# Allegro board NIR.brd
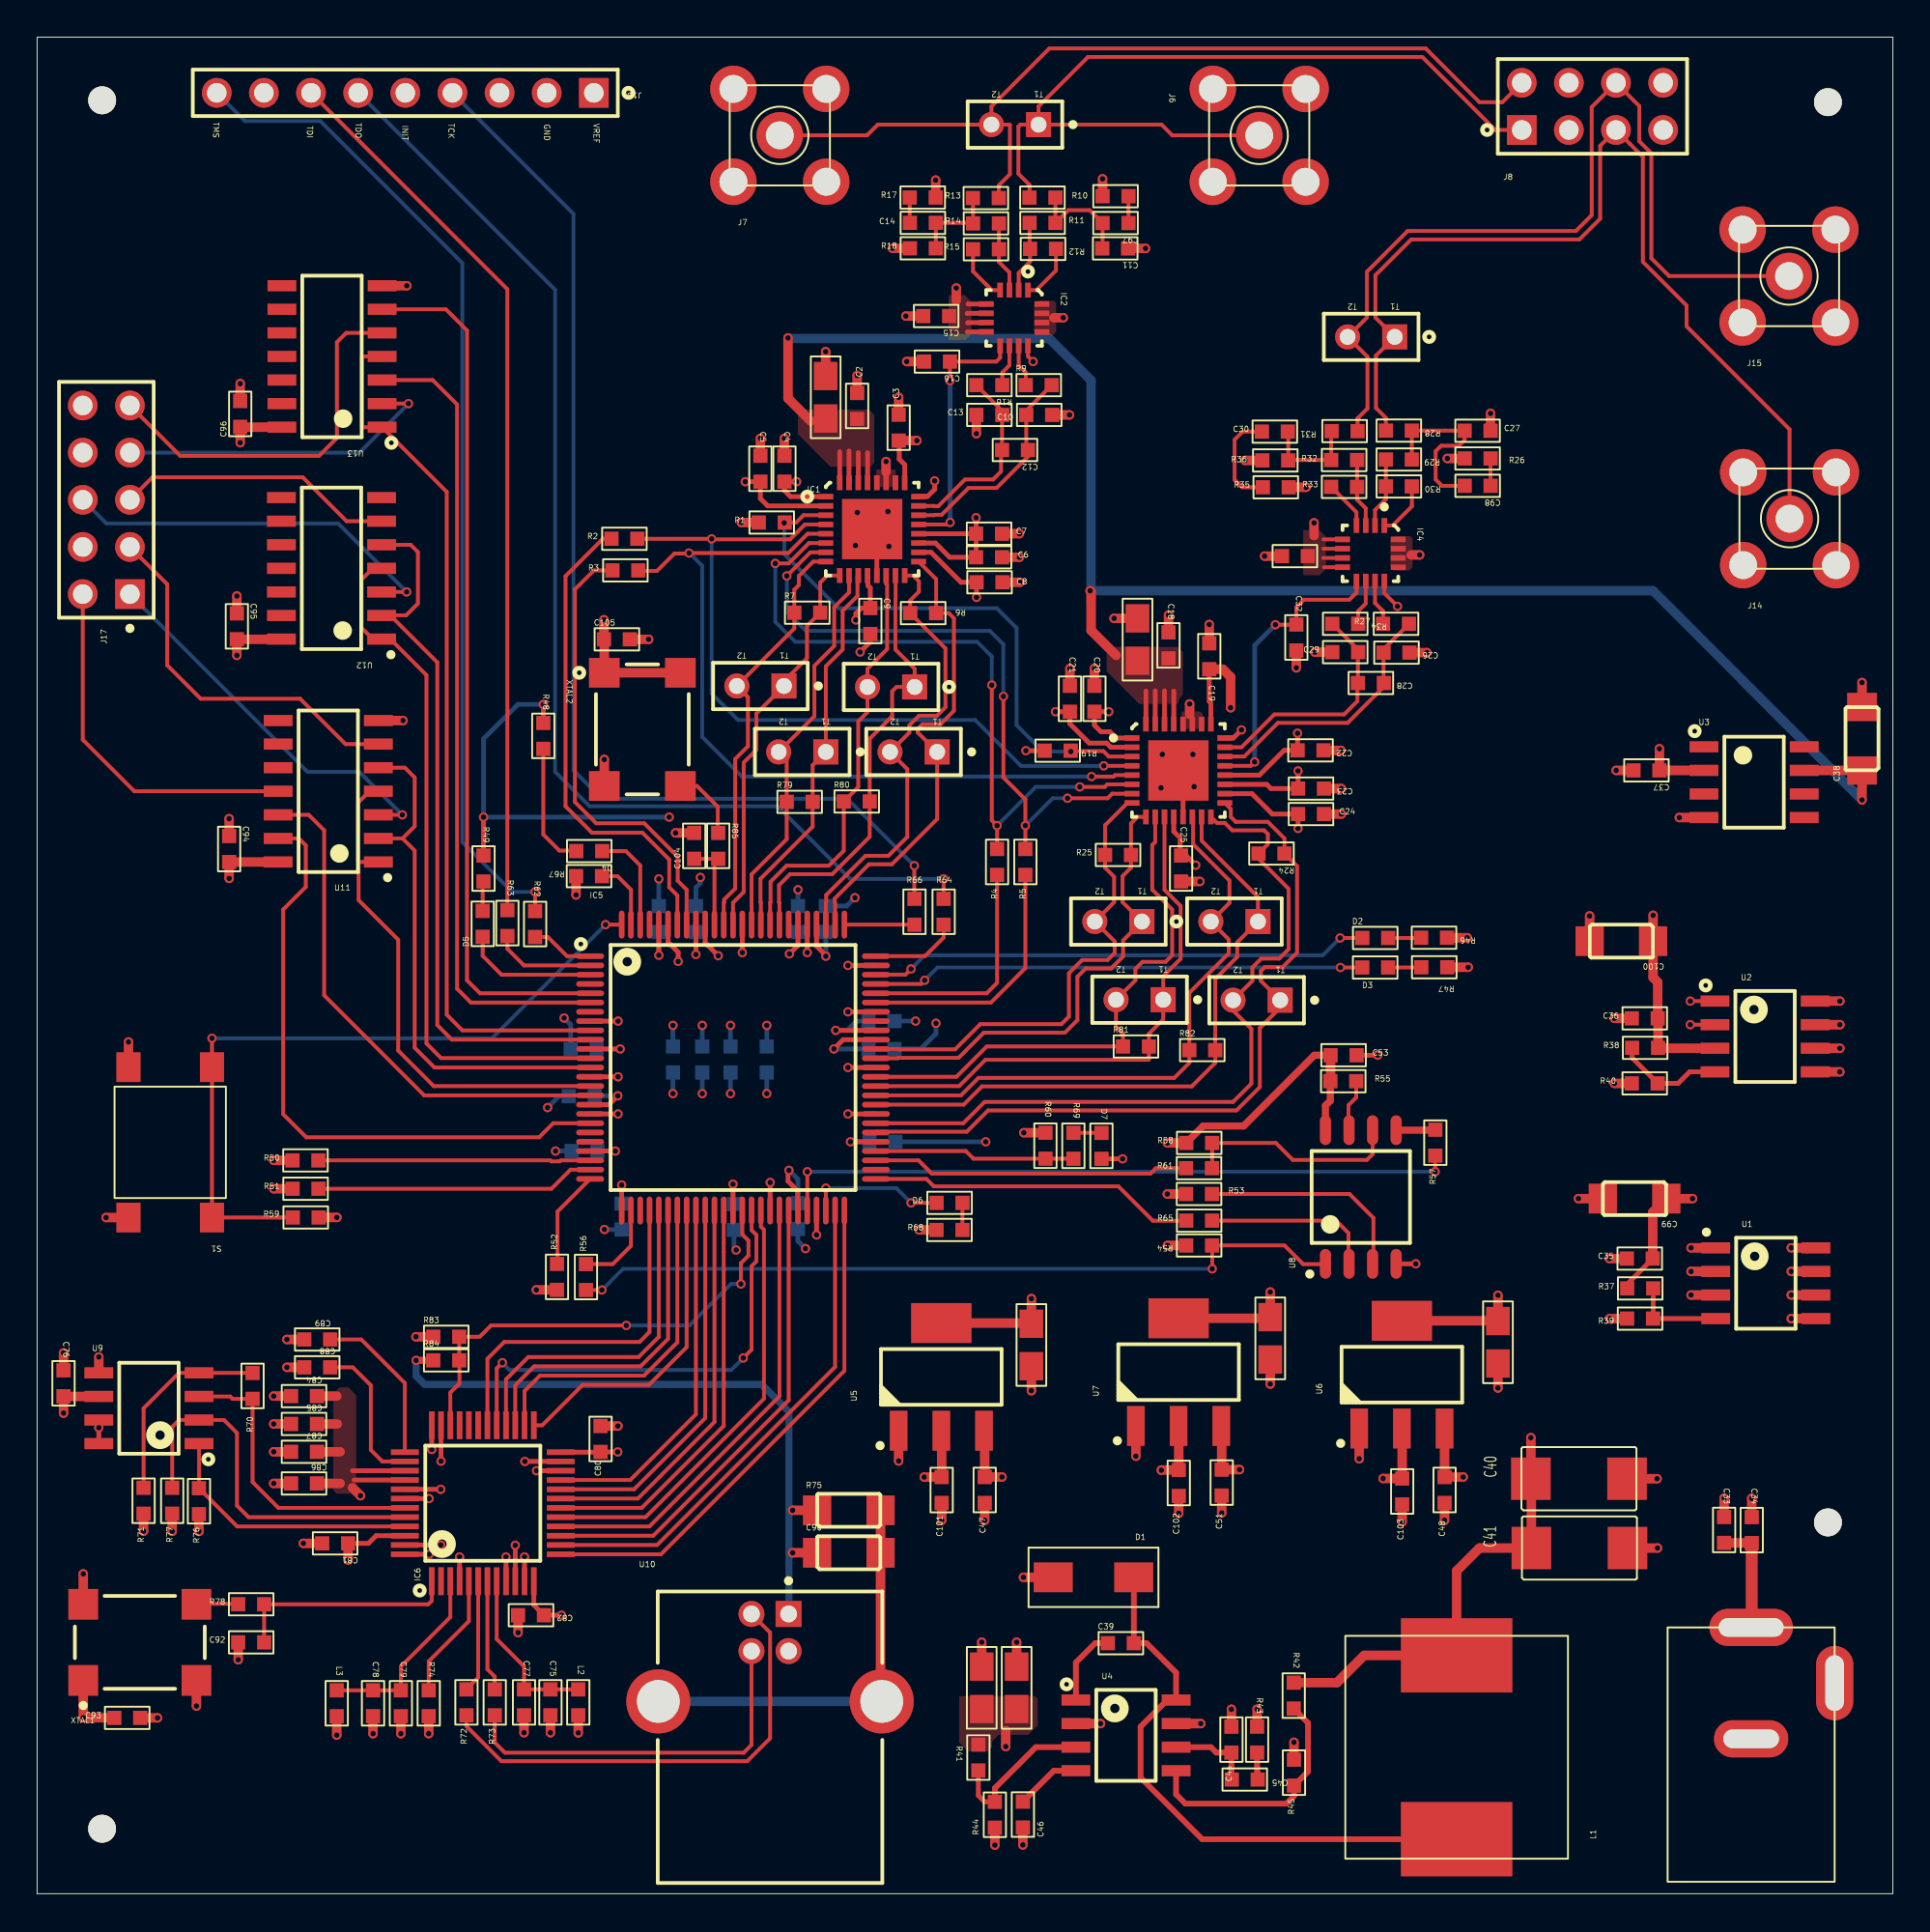
[diagram p0: board, top side]
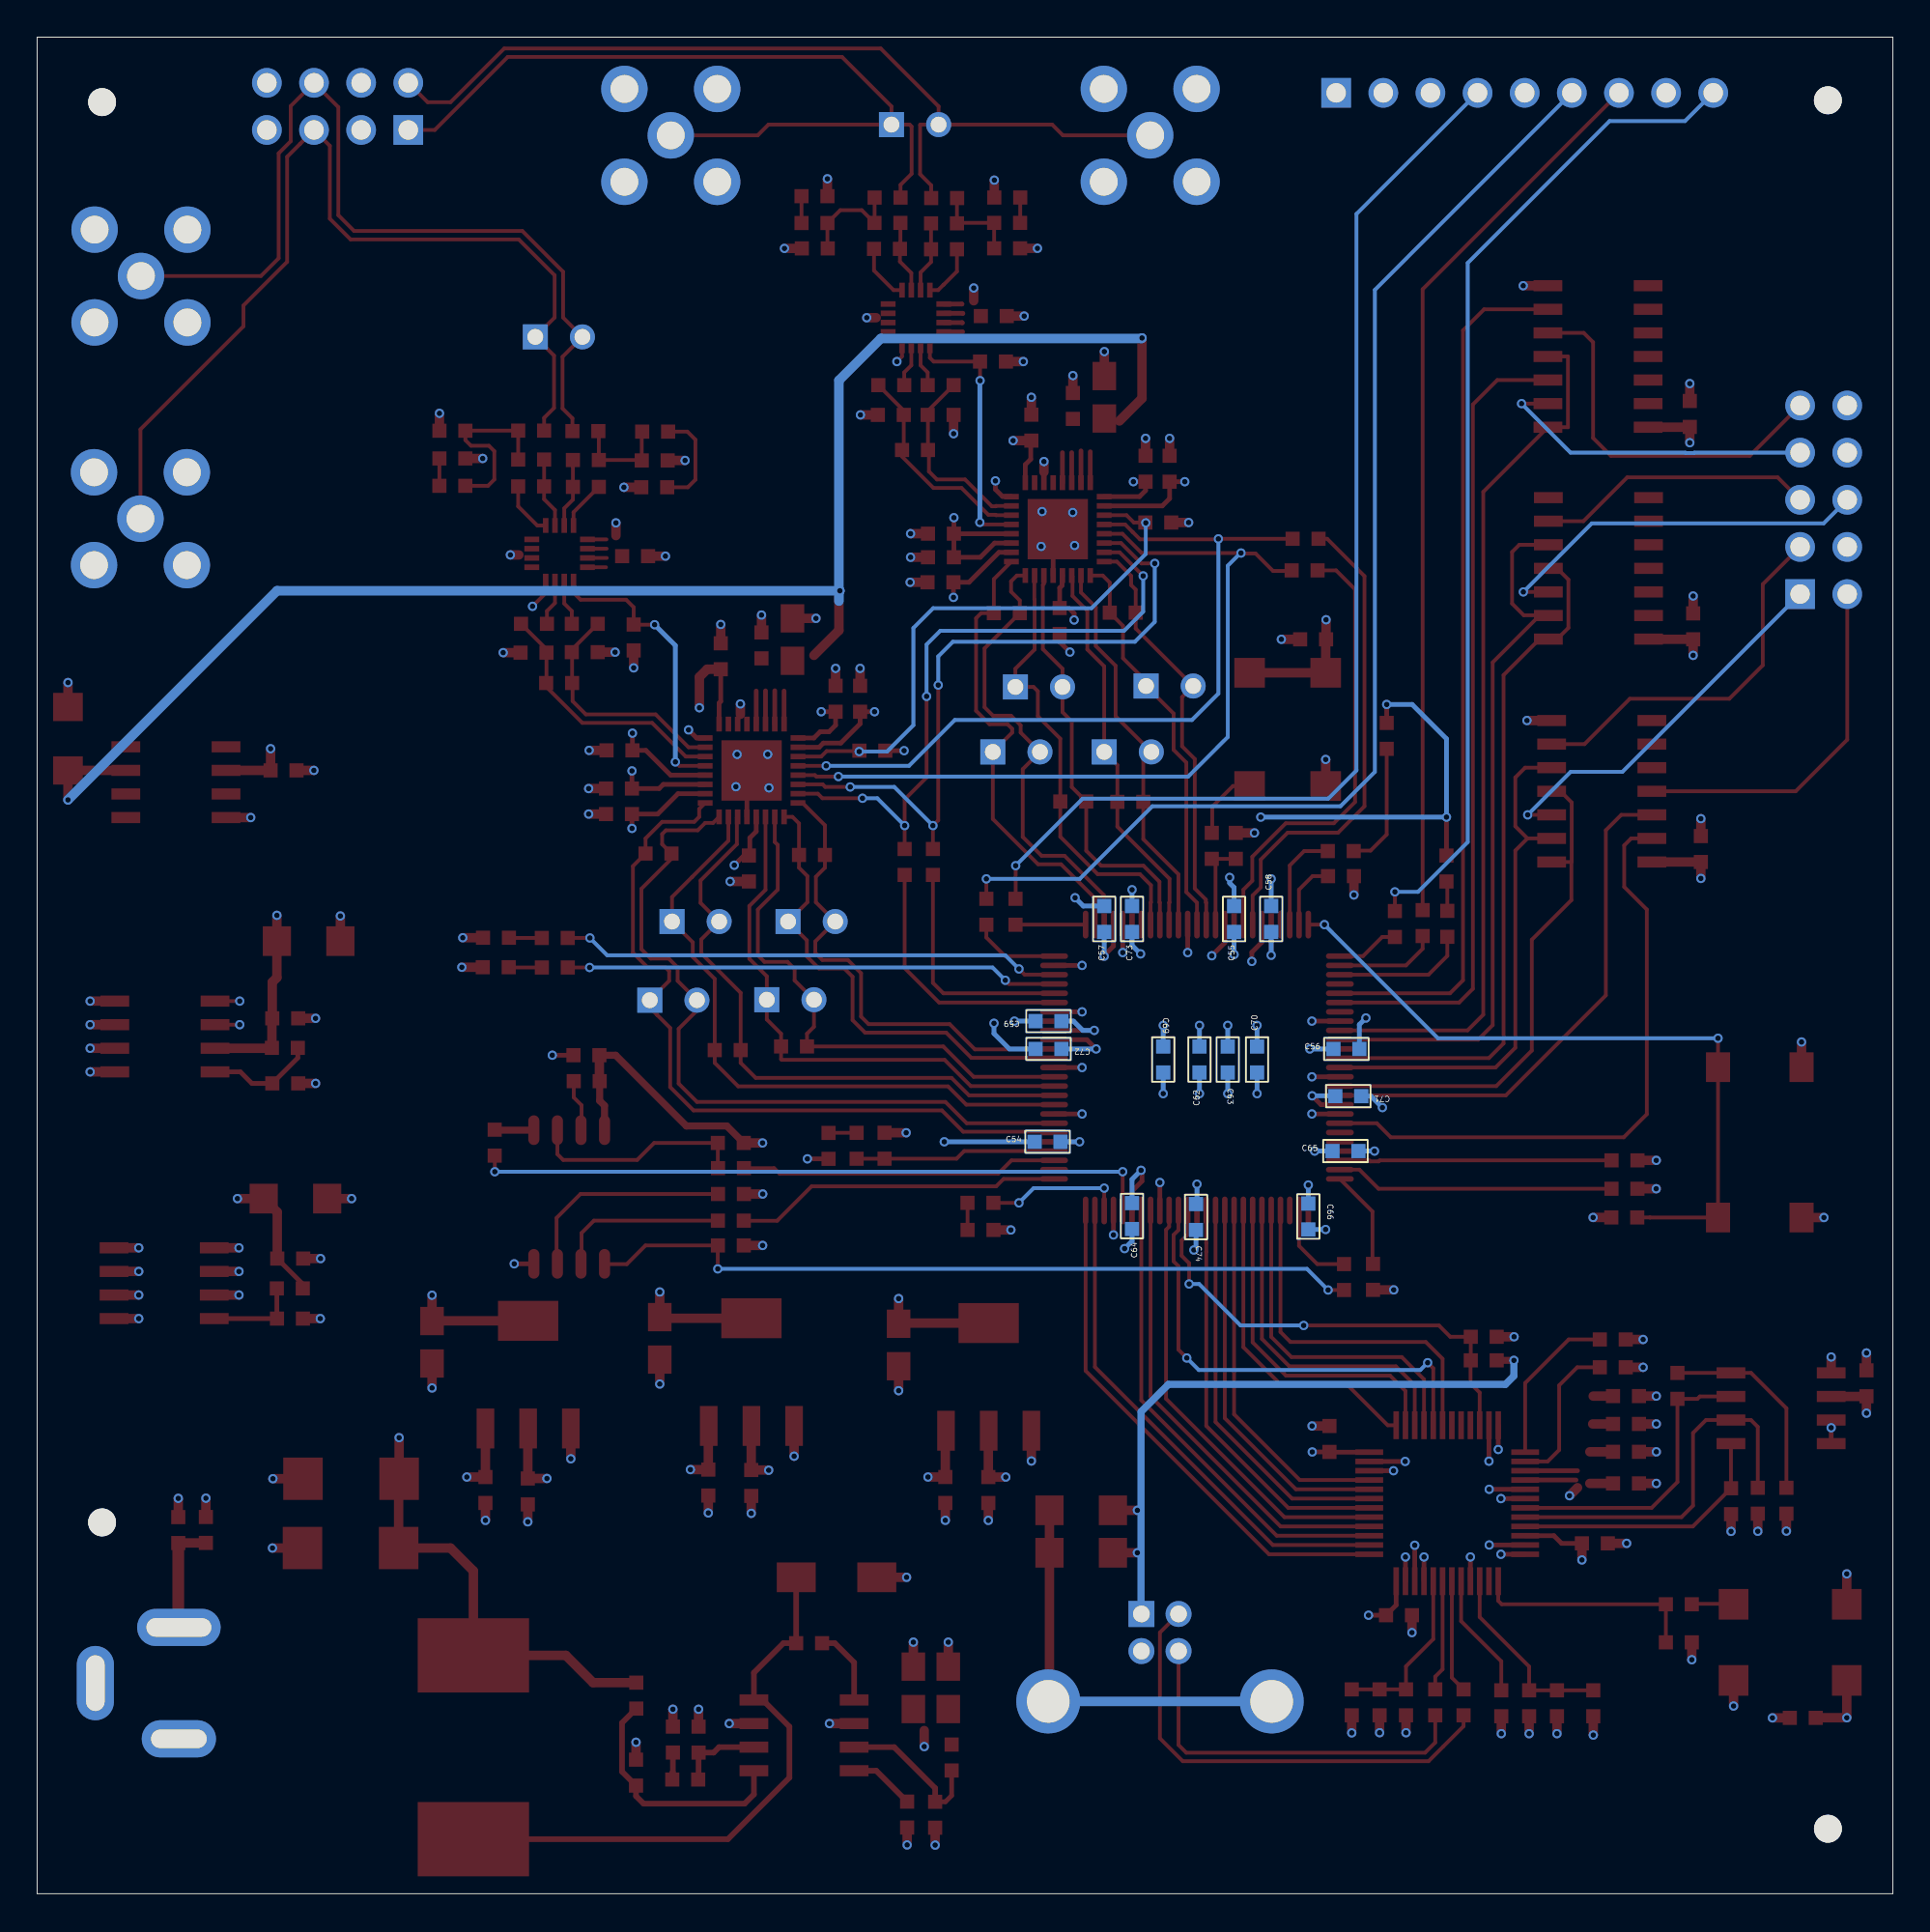
[diagram p1: board, bottom side, seen from below]

Outline 100 x 100 mm; copper layers: TOP, GND, POWER, BOTTOM. Coordinates in mm from the lower left corner of the outline.
Outline path: 0,100 0,0 100,0 100,100 0,100

## Design rules (mm)
net group DP1: nets 0CNV+ 0CNV-
net group DP2: nets 0D+ 0D-
net group DP3: nets 0DCO+ 0DCO-
net group DP4: nets 0CLK+ 0CLK-
net group DP5: nets 1CLK+ 1CLK-
net group DP6: nets 1CNV+ 1CNV-
net group DP7: nets 1D+ 1D-
net group DP8: nets 1DCO+ 1DCO-
net group DP9: nets N09257 N09261
net group DP10: nets 0DIFF_IN+ 0DIFF_IN-
net group DP11: nets 1AD_IN+ 1AD_IN-
net group DP12: nets 1DIFF_IN+ 1DIFF_IN-
net group DP13: nets N09249 N09253
net group DP14: nets N05221 N05236
net group DP15: nets N04222 N04258
nets with their own width: min track width 0.203; nets EN3 FT_RST INIT VCC7A VREF4
nets with their own width: min track width 0.254; nets GND VCC1V2 VCC1V8 VCC3V3 VCC5A
nets with their own width: min track width 0.508; nets VCC5 VCC12

## Placement (name value [footprint] x y rotation side)
C1  10uF  [0805]  42.49 80.6 90 top
C2  0.1uF  [0603]  44.19 80.13 90 top
C3  0.1uF  [0603]  46.42 78.97 90 top
C4  0.1uF  [0603]  40.27 76.75 270 top
C5  0.1uF  [0603]  38.97 76.75 270 top
C6  0.1uF  [0603]  51.3 71.98 180 top
C7  0.1uF  [0603]  51.3 73.26 180 top
C8  0.1uF  [0603]  51.32 70.64 0 top
C9  0.1uF  [0603]  44.9 68.55 270 top
C10  0.1uF  [0603]  54 79.65 180 top
C11  DNP  [0603]  58.09 88.62 180 top
C12  0.1uF  [0603]  52.69 77.76 180 top
C13  0.1uF  [0603]  51.31 79.65 180 top
C14  DNP  [0603]  47.73 90 180 top
C15  0.1uF  [0603]  48.45 84.98 180 top
C16  0.1uF  [0603]  48.49 82.53 180 top
C17  10uF  [0805]  59.3 67.55 90 top
C18  0.1uF  [0603]  60.97 67.24 90 top
C19  0.1uF  [0603]  63.16 66.65 90 top
C20  0.1uF  [0603]  56.97 64.36 270 top
C21  0.1uF  [0603]  55.65 64.36 270 top
C22  0.1uF  [0603]  68.62 61.58 180 top
C23  0.1uF  [0603]  68.64 59.53 180 top
C24  0.1uF  [0603]  68.64 58.15 0 top
C25  0.1uF  [0603]  61.64 55.22 270 top
C26  0.1uF  [0603]  73.25 66.85 180 top
C27  DNP  [0603]  77.62 78.8 180 top
C28  0.1uF  [0603]  71.87 65.21 180 top
C29  0.1uF  [0603]  70.49 66.87 180 top
C30  DNP  [0603]  66.7 78.75 180 top
C31  0.1uF  [0603]  67.78 72.04 180 top
C32  0.1uF  [0603]  67.85 67.66 270 top
C33  100pF  [0603]  90.91 19.59 270 top
C34  0.1uF  [0603]  92.39 19.59 270 top
C35  0.1uF  [0603]  86.36 34.21 180 top
C36  1uF  [0603]  86.63 47.15 180 top
C37  0.1uF  [0603]  86.72 60.5 180 top
C38  22uF  [1206]  98.34 62.21 90 top
C39  0.1uF  [0603]  58.4 13.49 0 top
C40  100uF  [6032]  83.08 22.35 0 top
C41  100uF  [6032]  83.11 18.62 0 top
C42  10uF  [0805]  50.9 11.09 90 top
C43  10uF  [0805]  52.78 11.09 90 top
C44  68pF  [0603]  64.36 8.3 90 top
C45  2.2nF  [0603]  65.08 6.15 0 top
C46  0.1uF  [0603]  53.12 4.26 270 top
C47  0.1uF  [0603]  51.06 21.75 270 top
C48  0.1uF  [0603]  75.84 21.74 270 top
C49  10uF  [0805]  53.58 29.55 270 top
C50  10uF  [0805]  78.72 29.7 270 top
C51  0.1uF  [0603]  63.83 22.14 270 top
C52  10uF  [0805]  66.45 29.91 270 top
C53  0.1uF  [0603]  70.4 45.16 0 top
C54  0.1uF  [0603]  45.55 40.5 0 bottom
C55  0.1uF  [0603]  35.5 52.5 90 bottom
C56  0.1uF  [0603]  29.45 45.5 180 bottom
C57  0.1uF  [0603]  42.5 52.5 90 bottom
C58  0.1uF  [0603]  33.5 52.5 90 bottom
C59  0.1uF  [0603]  45.5 47 0 bottom
C62  4.7uF  [0603]  37.37 44.93 90 bottom
C63  4.7uF  [0603]  35.84 44.93 270 bottom
C64  0.1uF  [0603]  41 36.5 270 bottom
C65  0.1uF  [0603]  29.5 40 180 bottom
C66  0.1uF  [0603]  31.5 36.47 270 bottom
C69  4.7uF  [0603]  39.32 44.93 270 bottom
C70  4.7uF  [0603]  34.26 44.93 90 bottom
C71  0.1uF  [0603]  29.35 42.96 180 bottom
C72  0.1uF  [0603]  45.5 45.5 0 bottom
C73  0.1uF  [0603]  41 52.5 90 bottom
C74  0.1uF  [0603]  37.55 36.45 270 bottom
C75  4.7uF  [0603]  27.66 10.31 270 top
C76  0.1uF  [0603]  1.42 27.49 270 top
C77  0.1uF  [0603]  26.24 10.31 270 top
C78  4.7uF  [0603]  18.1 10.26 270 top
C79  0.1uF  [0603]  19.6 10.26 270 top
C80  0.1uF  [0603]  30.36 24.49 90 top
C81  0.1uF  [0603]  16.06 18.87 180 top
C82  0.1uF  [0603]  26.61 15 180 top
C84  4.7uF  [0603]  14.38 26.8 180 top
C85  0.1uF  [0603]  14.38 25.3 180 top
C86  4.7uF  [0603]  14.38 22.1 180 top
C87  0.1uF  [0603]  14.38 23.8 180 top
C88  0.1uF  [0603]  15.09 28.35 180 top
C89  0.1uF  [0603]  15.09 29.85 180 top
C90  100nF  [1206]  43.74 18.36 0 top
C92  0.1uF  [0603]  11.53 13.54 180 top
C93  0.1uF  [0603]  4.86 9.47 0 top
C94  0.1uF  [0603]  10.35 56.27 270 top
C95  0.1uF  [0603]  10.76 68.26 270 top
C96  0.1uF  [0603]  10.94 79.7 90 top
C97  DNP  [0603]  58.11 89.99 180 top
C98  DNP  [0603]  77.62 75.83 180 top
C99  22uF  [1206]  86.08 37.44 180 top
C100  22uF  [1206]  85.37 51.31 180 top
C101  100uF  [0603]  48.74 21.74 270 top
C102  100uF  [0603]  61.52 22.12 270 top
C103  100uF  [0603]  73.56 21.67 270 top
C104  0.1uF  [0603]  35.41 56.44 90 top
C105  0.1uF  [0603]  31.24 67.56 0 top
D1  DIODE  [SMA]  56.92 17.04 180 top
D2  DIODE  [0603]  72.11 51.48 0 top
D3  DIODE  [0603]  72.1 49.89 0 top
D4  DIODE  [0603]  29.75 56.16 180 top
D5  DIODE  [0603]  24.01 52.24 90 top
D6  LED  [0603]  49.17 37.21 0 top
D7  LED  [0603]  57.35 40.28 90 top
IC1  ad7961  [AD7961]  45 73.5 0 top
IC2  ada4932  [ADA4932]  52.64 84.87 270 top
IC3  ad7961  [AD7961]  61.5 60.5 0 top
IC4  ada4932  [ADA4932]  71.84 72.2 270 top
IC5  XC3S200A-VQ100  [XCS200A]  37.5 44.5 0 top
IC6  ft232h  [FT232H]  24.02 21.03 90 top
J1  header1  [P12]  48.5 61.5 180 top
J2  header1  [P12]  40.24 65.05 180 top
J3  header1  [P12]  42.5 61.5 180 top
J4  header1  [P12]  47.29 65 180 top
J5  header1  [P12]  53.96 95.29 180 top
J6  smb  [SMB]  65.85 94.71 270 top
J7  smb  [SMB]  40.02 94.71 0 top
J8  header4x2  [P2L4]  80 95 0 top
J9  header1  [P12]  66.98 48.13 180 top
J10  header1  [P12]  59.53 52.36 180 top
J11  header1  [P12]  60.68 48.15 180 top
J12  header1  [P12]  65.79 52.36 180 top
J13  header1  [P12]  73.16 83.85 180 top
J14  smb  [SMB]  94.43 74.06 0 top
J15  smb  [SMB]  94.4 87.13 0 top
J16  jtag  [JTAG]  30 97 180 top
J17  header2  [HEADER2]  5 70 90 top
L1  6.8uH  [INDU127]  76.49 7.89 90 top
L2  600mOhm  [0603]  29.16 10.31 90 top
L3  600mOhm  [0603]  16.14 10.26 90 top
NOREF  -  [unnamed]  3.5 3.5 0 top
NOREF#2  -  [unnamed]  96.5 96.5 0 top
NOREF#3  -  [unnamed]  3.5 96.6 0 top
NOREF#4  -  [unnamed]  96.5 20 0 top
P1  dc12  [DC12]  92.36 0.64 90 top
R1  0R  [0603]  39.58 73.86 180 top
R2  0R  [0603]  31.65 72.98 0 top
R3  0R  [0603]  31.7 71.28 0 top
R4  0R  [0603]  51.73 55.57 90 top
R5  0R  [0603]  53.25 55.57 90 top
R6  100R  [0603]  47.75 68.97 180 top
R7  100R  [0603]  41.5 69 0 top
R8  DNP  [0603]  58.11 91.43 0 top
R9  33  [0603]  53.97 81.26 0 top
R10  0R  [0603]  54.17 91.36 0 top
R11  499  [0603]  54.18 89.99 180 top
R12  499  [0603]  54.2 88.6 0 top
R13  0R  [0603]  51.12 91.33 180 top
R14  499  [0603]  51.13 89.97 0 top
R15  499  [0603]  51.13 88.57 180 top
R16  33  [0603]  51.31 81.26 180 top
R17  DNP  [0603]  47.72 91.36 0 top
R18  DNP  [0603]  47.73 88.63 180 top
R19  0R  [0603]  54.99 61.57 180 top
R24  100  [0603]  66.52 56.03 180 top
R25  100R  [0603]  58.25 55.95 0 top
R26  DNP  [0603]  77.62 77.31 0 top
R27  33  [0603]  73.23 68.4 0 top
R28  0R  [0603]  73.38 78.81 0 top
R29  499  [0603]  73.38 77.25 180 top
R30  499  [0603]  73.38 75.8 0 top
R31  0R  [0603]  70.46 78.78 180 top
R32  499  [0603]  70.43 77.22 0 top
R33  499  [0603]  70.43 75.77 180 top
R34  33  [0603]  70.49 68.4 180 top
R35  DNP  [0603]  66.75 75.75 0 top
R36  DNP  [0603]  66.72 77.2 180 top
R37  2.16K  [0603]  86.38 32.6 0 top
R38  3.3K  [0603]  86.65 45.56 180 top
R39  10K  [0603]  86.38 30.98 180 top
R40  10K  [0603]  86.63 43.65 180 top
R41  348K  [0603]  50.72 7.33 270 top
R42  10K  [0603]  67.71 10.67 270 top
R43  15K  [0603]  65.74 8.3 90 top
R44  76.8K  [0603]  51.61 4.25 270 top
R45  1.87K  [0603]  67.73 6.52 90 top
R46  1K  [0603]  75.27 51.49 180 top
R47  1K  [0603]  75.29 49.9 180 top
R48  1K  [0603]  27.28 62.36 270 top
R49  1K  [0603]  24.05 55.22 270 top
R50  10K  [0603]  14.46 39.5 0 top
R51  10K  [0603]  14.47 37.97 0 top
R52  10K  [0603]  28.01 33.22 90 top
R53  10K  [0603]  62.61 37.69 0 top
R54  10K  [0603]  62.62 34.92 0 top
R55  10K  [0603]  70.38 43.76 180 top
R56  33R  [0603]  29.58 33.22 270 top
R57  33R  [0603]  75.34 40.45 90 top
R58  4.7K  [0603]  62.62 40.44 0 top
R59  4.7K  [0603]  14.47 36.42 180 top
R60  4.7K  [0603]  54.33 40.29 270 top
R61  33R  [0603]  62.61 39.08 180 top
R62  1K  [0603]  26.83 52.23 270 top
R63  1K  [0603]  25.34 52.28 270 top
R64  1K  [0603]  48.85 52.89 270 top
R65  33R  [0603]  62.62 36.25 0 top
R66  1K  [0603]  47.28 52.89 90 top
R67  390  [0603]  29.74 54.81 180 top
R68  390  [0603]  49.16 35.75 0 top
R69  390  [0603]  55.84 40.29 90 top
R70  10K  [0603]  11.61 27.35 90 top
R71  10K  [0603]  5.74 21.17 90 top
R72  33R  [0603]  23.14 10.31 90 top
R73  33R  [0603]  24.66 10.31 90 top
R74  12K  [0603]  21.1 10.26 90 top
R75  1MEG  [1206]  43.74 20.65 0 top
R76  10K  [0603]  8.72 21.14 90 top
R77  10K  [0603]  7.28 21.17 90 top
R78  R  [0603]  11.53 15.59 0 top
R79  100R  [0603]  41.09 58.81 0 top
R80  100R  [0603]  44.17 58.83 0 top
R81  100R  [0603]  59.21 45.64 0 top
R82  100R  [0603]  62.79 45.44 0 top
R83  10K  [0603]  22.05 30 0 top
R84  4.7K  [0603]  22.05 28.73 0 top
R85  R  [0603]  36.7 56.44 270 top
S1  switch  [SWITCH2]  7.17 40.47 180 top
U1  mic5209bm  [SOIC127P600X175-8N]  93.15 32.88 0 top
U2  mic5209bm  [SOIC127P600X175-8N]  93.11 46.17 0 top
U3  ref5040  [SOIC127P600X175-8N]  92.52 59.87 0 top
U4  tps54331  [SOIC127P600X175-8N]  58.67 8.53 0 top
U5  ams1117  [AMS1117]  48.72 27.84 90 top
U6  ams1117  [AMS1117]  73.54 27.96 90 top
U7  ams1117  [AMS1117]  61.51 28.1 90 top
U8  m25p80  [M25P80]  71.33 37.53 90 top
U9  93c46  [SOIC127P600X175-8N]  6.03 26.15 180 top
U10  usb-b  [USB-B]  40.49 15.07 0 top
U11  74hct125  [74LCT125]  15.69 59.38 180 top
U12  74hct125  [74LCT125]  15.86 71.39 180 top
U13  74lvc125  [74LCT125]  15.89 82.8 180 top
XTAL1  co4305  [CO4305]  5.53 13.54 90 top
XTAL2  co4305  [CO4305]  32.61 62.71 0 top

## Library data of the parts
C1 C17 = CAP
C2-C14 C16 C18-C30 C32-C41 C44-C48 C51 C53-C59 C62-C66 C69-C82 C84-C90 C92-C105 = CAPACITOR NON-POL
C15 C31 = CAP NP
C42 C43 C49 C50 C52 = CAP POL
D1-D5 = DIODE
D6 D7 = LED
IC1 IC3 = ad7961
IC2 IC4 = ada4932
IC5 = XC3S200A-VQ100
IC6 = ft232h
J1-J5 J9-J13 = header1
J6 J7 J14 J15 = smb
J8 = header4x2
J16 = JTAG
J17 = header2
L1-L3 = INDUCTOR
P1 = dc12
R1-R19 R24-R85 = R
S1 = switch
U1 U2 = mic5209bm
U3 = ref5040
U4 = tps54331
U5-U7 = ams1117
U8 = m25p80
U9 = 93c46
U10 = usb-b
U11 U12 = 74hct125
U13 = 74lvc125
XTAL1 XTAL2 = co4305

## Footprints (pads in the part's own frame, mm; a bottom-side part is the same pattern mirrored in y, then rotated)
74LCT125
  rect 1.55x0.6 smd: 1(-2.7,3.81) 2(-2.7,2.54) 3(-2.7,1.27) 4(-2.7,0) 5(-2.7,-1.27) 6(-2.7,-2.54) 7(-2.7,-3.81) 8(2.7,-3.81) 9(2.7,-2.54) 10(2.7,-1.27) 11(2.7,0) 12(2.7,1.27) 13(2.7,2.54) 14(2.7,3.81)
0603
  rect 0.762x0.762 smd: 1(-0.699,0) 2(0.699,0)
0805
  rect 1.524x1.27 smd: 1(-1.143,0) 2(1.143,0)
1206
  rect 1.52x1.6 smd: 1(-1.71,0) 2(1.71,0)
6032
  rect 2.13x2.28 smd: 1(-2.59,0) 2(2.59,0)
AD7961
  rect 0.8x0.3 smd: 1(-2.5,1.75) 2(-2.5,1.25) 3(-2.5,0.75) 4(-2.5,0.25) 5(-2.5,-0.25) 6(-2.5,-0.75) 7(-2.5,-1.25) 8(-2.5,-1.75) 17(2.5,-1.75) 18(2.5,-1.25) 19(2.5,-0.75) 20(2.5,-0.25) 21(2.5,0.25) 22(2.5,0.75) 23(2.5,1.25) 24(2.5,1.75)
  rect 0.3x0.8 smd: 9(-1.75,-2.5) 10(-1.25,-2.5) 11(-0.75,-2.5) 12(-0.25,-2.5) 13(0.25,-2.5) 14(0.75,-2.5) 15(1.25,-2.5) 16(1.75,-2.5) 25(1.75,2.5) 26(1.25,2.5) 27(0.75,2.5) 28(0.25,2.5) 29(-0.25,2.5) 30(-0.75,2.5) 31(-1.25,2.5) 32(-1.75,2.5)
  rect 3.25x3.25 smd: 33(0,0)
ADA4932
  rect 0.8x0.3 smd: 1(-1.5,0.75) 2(-1.5,0.25) 3(-1.5,-0.25) 4(-1.5,-0.75) 9(1.5,-0.75) 10(1.5,-0.25) 11(1.5,0.25) 12(1.5,0.75)
  rect 0.3x0.8 smd: 5(-0.75,-1.5) 6(-0.25,-1.5) 7(0.25,-1.5) 8(0.75,-1.5) 13(0.75,1.5) 14(0.25,1.5) 15(-0.25,1.5) 16(-0.75,1.5)
AMS1117
  rect 2.15x0.95 smd: 1(-2.9,2.3) 2(-2.9,0) 3(-2.9,-2.3)
  rect 2.15x3.25 smd: 4(2.9,0)
CO4305
  rect 1.65x1.6 smd: 1(-2.05,3.05) 2(-2.05,-3.05) 3(2.05,-3.05) 4(2.05,3.05)
DC12
  oval 2x4.5 hole 1x3.5: 1(13.7,0)
  oval 2x4 hole 1x3: 2(7.7,0)
  oval 4x2 hole 3x1: 3(10.7,-4.5)
FT232H
  rect 1.5x0.3 smd: 1(-4.2,2.75) 2(-4.2,2.25) 3(-4.2,1.75) 4(-4.2,1.25) 5(-4.2,0.75) 6(-4.2,0.25) 7(-4.2,-0.25) 8(-4.2,-0.75) 9(-4.2,-1.25) 10(-4.2,-1.75) 11(-4.2,-2.25) 12(-4.2,-2.75) 25(4.2,-2.75) 26(4.2,-2.25) 27(4.2,-1.75) 28(4.2,-1.25) 29(4.2,-0.75) 30(4.2,-0.25) 31(4.2,0.25) 32(4.2,0.75) 33(4.2,1.25) 34(4.2,1.75) 35(4.2,2.25) 36(4.2,2.75)
  rect 0.3x1.5 smd: 13(-2.75,-4.2) 14(-2.25,-4.2) 15(-1.75,-4.2) 16(-1.25,-4.2) 17(-0.75,-4.2) 18(-0.25,-4.2) 19(0.25,-4.2) 20(0.75,-4.2) 21(1.25,-4.2) 22(1.75,-4.2) 23(2.25,-4.2) 24(2.75,-4.2) 37(2.75,4.2) 38(2.25,4.2) 39(1.75,4.2) 40(1.25,4.2) 41(0.75,4.2) 42(0.25,4.2) 43(-0.25,4.2) 44(-0.75,4.2) 45(-1.25,4.2) 46(-1.75,4.2) 47(-2.25,4.2) 48(-2.75,4.2)
HEADER2
  rect 1.6x1.6 hole 1.05: 1(0,0)
  round 1.6 hole 1.05: 2(0,2.54) 3(2.54,0) 4(2.54,2.54) 5(5.08,0) 6(5.08,2.54) 7(7.62,0) 8(7.62,2.54) 9(10.16,0) 10(10.16,2.54)
INDU127
  rect 4x6 smd: 1(-4.95,0) 2(4.95,0)
JTAG
  rect 1.6x1.6 hole 1.05: 1(0,0)
  round 1.6 hole 1.05: 2(2.54,0) 3(5.08,0) 4(7.62,0) 5(10.16,0) 6(12.7,0) 7(15.24,0) 8(17.78,0) 9(20.32,0)
M25P80
  oval 1.6x0.6 smd: 1(-3.6,1.905) 2(-3.6,0.635) 3(-3.6,-0.635) 4(-3.6,-1.905) 5(3.6,-1.905) 6(3.6,-0.635) 7(3.6,0.635) 8(3.6,1.905)
P2L4
  rect 1.6x1.6 hole 1.05: 1(0,0)
  round 1.6 hole 1.05: 2(0,2.54) 3(2.54,0) 4(2.54,2.54) 5(5.08,0) 6(5.08,2.54) 7(7.62,0) 8(7.62,2.54)
P12
  rect 1.35x1.35 hole 0.85: 1(0,0)
  round 1.35 hole 0.85: 2(2.54,0)
SMA
  rect 2.1x1.6 smd: 1(-2.17,0) 2(2.17,0)
SMB
  round 2.5 hole 1.5: 1(0,0) 2(-2.5,2.5) 3(2.5,2.5) 4(-2.5,-2.5) 5(2.5,-2.5)
SOIC127P600X175-8N
  rect 1.55x0.6 smd: 1(-2.7,1.905) 2(-2.7,0.635) 3(-2.7,-0.635) 4(-2.7,-1.905) 5(2.7,-1.905) 6(2.7,-0.635) 7(2.7,0.635) 8(2.7,1.905)
SWITCH2
  rect 1.3x1.6 smd: 1(-2.25,4.05) 2(2.25,4.05) 3(-2.25,-4.05) 4(2.25,-4.05)
unnamed
  round 1.5 hole 3.5 unplated: (0,0)
USB-B
  rect 1.4x1.4 hole 0.9: 1(0,0)
  round 1.4 hole 0.9: 2(-2,0) 3(-2,-2) 4(0,-2)
  round 3.45 hole 2.3: M1(-7.02,-4.71) M2(5.02,-4.71)
XCS200A
  oval 1.5x0.3 smd: 1(-7.7,6) 2(-7.7,5.5) 3(-7.7,5) 4(-7.7,4.5) 5(-7.7,4) 6(-7.7,3.5) 7(-7.7,3) 8(-7.7,2.5) 9(-7.7,2) 10(-7.7,1.5) 11(-7.7,1) 12(-7.7,0.5) 13(-7.7,0) 14(-7.7,-0.5) 15(-7.7,-1) 16(-7.7,-1.5) 17(-7.7,-2) 18(-7.7,-2.5) 19(-7.7,-3) 20(-7.7,-3.5) 21(-7.7,-4) 22(-7.7,-4.5) 23(-7.7,-5) 24(-7.7,-5.5) 25(-7.7,-6) 51(7.7,-6) 52(7.7,-5.5) 53(7.7,-5) 54(7.7,-4.5) 55(7.7,-4) 56(7.7,-3.5) 57(7.7,-3) 58(7.7,-2.5) 59(7.7,-2) 60(7.7,-1.5) 61(7.7,-1) 62(7.7,-0.5) 63(7.7,0) 64(7.7,0.5) 65(7.7,1) 66(7.7,1.5) 67(7.7,2) 68(7.7,2.5) 69(7.7,3) 70(7.7,3.5) 71(7.7,4) 72(7.7,4.5) 73(7.7,5) 74(7.7,5.5) 75(7.7,6)
  oval 0.3x1.5 smd: 26(-6,-7.7) 27(-5.5,-7.7) 28(-5,-7.7) 29(-4.5,-7.7) 30(-4,-7.7) 31(-3.5,-7.7) 32(-3,-7.7) 33(-2.5,-7.7) 34(-2,-7.7) 35(-1.5,-7.7) 36(-1,-7.7) 37(-0.5,-7.7) 38(0,-7.7) 39(0.5,-7.7) 40(1,-7.7) 41(1.5,-7.7) 42(2,-7.7) 43(2.5,-7.7) 44(3,-7.7) 45(3.5,-7.7) 46(4,-7.7) 47(4.5,-7.7) 48(5,-7.7) 49(5.5,-7.7) 50(6,-7.7) 76(6,7.7) 77(5.5,7.7) 78(5,7.7) 79(4.5,7.7) 80(4,7.7) 81(3.5,7.7) 82(3,7.7) 83(2.5,7.7) 84(2,7.7) 85(1.5,7.7) 86(1,7.7) 87(0.5,7.7) 88(0,7.7) 89(-0.5,7.7) 90(-1,7.7) 91(-1.5,7.7) 92(-2,7.7) 93(-2.5,7.7) 94(-3,7.7) 95(-3.5,7.7) 96(-4,7.7) 97(-4.5,7.7) 98(-5,7.7) 99(-5.5,7.7) 100(-6,7.7)

## Nets
0VCM: C16.1 IC1.21(VCM) IC2.9(VCM)
1VCM: C32.1 IC3.21(VCM) IC4.9(VCM)
GND: C1.2 C2.2 C3.2 C4.1 C5.1 C6.1 C7.1 C8.2 C9.2 C10.1 C11.1 C13.2 C15.2 C16.2 C17.2 C18.2 C19.2 C20.1 C21.1 C22.1 C23.1 C24.2 C25.2 C26.1 C27.1 C29.2 C31.2 C32.2 C33.1 C34.1 C35.2 C36.2 C37.2 C38.2 C40.2 C41.2 C42.2 C43.2 C44.2 C46.2 C47.2 C48.2 C49.2 C50.2 C51.2 C52.2 C53.2 C54.2 C55.2 C56.2 C57.2 C58.2 C59.2 C62.2 C63.2 C64.2 C65.2 C66.2 C69.2 C70.2 C71.2 C72.2 C73.2 C74.2 C75.2 C76.1 C77.2 C78.2 C79.2 C80.2 C81.2 C82.2 C84.2 C85.2 C86.2 C87.2 C88.2 C89.2 C90.1 C92.2 C93.2 C94.1 C95.1 C96.2 C99.2 C100.2 C101.2 C102.2 C103.2 C104.2 C105.2 D1.2(A) D7.1(CATHODE) IC1.13(GND1) IC1.24(GND2) IC1.26(REF_GND1) IC1.27(REF_GND2) IC1.28(REF_GND3) IC1.33(GND) IC2.13(VS1-) IC2.14(VS2-) IC2.15(VS3-) IC2.16(VS4-) IC3.13(GND1) IC3.24(GND2) IC3.26(REF_GND1) IC3.27(REF_GND2) IC3.28(REF_GND3) IC3.33(GND) IC4.13(VS1-) IC4.14(VS2-) IC4.15(VS3-) IC4.16(VS4-) IC5.8(GND1) IC5.14(GND2) IC5.18(GND3) IC5.42(GND4) IC5.47(GND5) IC5.58(GND6) IC5.63(GND7) IC5.69(GND8) IC5.74(GND9) IC5.80(GND10) IC5.87(GND11) IC5.91(GND12) IC5.95(GND13) IC6.4(AGND1) IC6.9(AGND2) IC6.10(AGND4) IC6.11(GND1) IC6.22(GND2) IC6.23(GND3) IC6.35(GND4) IC6.36(GND5) IC6.41(AGND3) IC6.42(TEST) IC6.47(GND6) IC6.48(GND7) J6.2(S1) J6.3(S2) J6.4(S3) J6.5(S4) J7.2(S1) J7.3(S2) J7.4(S3) J7.5(S4) J8.3 J8.4 J8.7 J8.8 J14.2(S1) J14.3(S2) J14.4(S3) J14.5(S4) J15.2(S1) J15.3(S2) J15.4(S3) J15.5(S4) J16.2 J17.4 J17.8 J17.10 P1.2 P1.3 R1.2 R8.1 R17.2 R18.2 R19.2 R26.1 R35.2 R36.2 R39.2 R40.2 R43.2 R44.2 R45.2 R50.1 R51.1 R67.2 R74.1 R75.1 R83.1 S1.2 S1.4 U1.5(GND1) U1.6(GND2) U1.7(GND3) U1.8(GND4) U2.5(GND1) U2.6(GND2) U2.7(GND3) U2.8(GND4) U3.4(GND) U4.7(GND) U5.1(GND) U6.1(GND) U7.1(GND) U8.4(VSS) U9.5(VSS) U10.4(GND) U11.7(GND) U13.7(GND) XTAL1.2(GND) XTAL2.2(GND)
VCC1V2: C52.1 C69.1 C71.1 C72.1 C73.1 C74.1 C102.1 IC5.17(VCCINT_3) IC5.38(VCCINT_2) IC5.66(VCCINT_1) IC5.81(VCCINT_0) U7.2(VOUT) U7.4(TAB)
VCC1V8: C3.1 C5.2 C8.1 C9.1 C19.1 C21.2 C24.1 C25.1 C50.1 C57.1 C58.1 C59.1 C63.1 C103.1 IC1.2(VDD21) IC1.12(VIO) IC1.18(VDD22) IC1.25(VDD23) IC3.2(VDD21) IC3.12(VIO) IC3.18(VDD22) IC3.25(VDD23) IC5.67(VCCO_1) IC5.79(VCCO_01) IC5.96(VCCO_02) R46.1 R47.1 R48.1 R49.1 U6.2(VOUT) U6.4(TAB)
VCC3V3: C49.1 C53.1 C54.1 C55.1 C56.1 C62.1 C64.1 C65.1 C66.1 C70.1 C76.2 C80.1 C81.1 C82.1 C84.1 C85.1 C86.1 C87.1 C93.1 C96.1 C101.1 C105.1 IC5.11(VCCO_3) IC5.22(VCCAUX_3) IC5.26(VCCO_21) IC5.45(VCCO_22) IC5.55(VCCAUX_1) IC5.92(VCCAUX_0) IC6.12(VCCIO1) IC6.24(VCCIO2) IC6.39(VCCD) IC6.40(VREGIN) IC6.46(VCCIO3) J16.1 L2.1 L3.1 R52.1 R53.1 R54.1 R55.2 R58.1 R59.1 R60.1 R68.1 R71.1 R76.1 R77.1 U5.2(VOUT) U5.4(TAB) U8.8(VCC) U9.6(ORG) U9.8(VCC) U13.14(VCC) XTAL1.1(E/D) XTAL1.4(VDD) XTAL2.1(E/D) XTAL2.4(VDD)
VCC5: C40.1 C41.1 C47.1 C48.1 C51.1 C94.2 C95.2 L1.2 R42.1 U5.3(VIN) U6.3(VIN) U7.3(VIN) U11.14(VCC) U12.14(VCC)
VCC5A: C4.2 C6.2 C7.2 C20.2 C22.2 C23.2 C36.1 C100.1 IC1.1(VDD11) IC1.19(VDD12) IC1.20(VDD13) IC3.1(VDD11) IC3.19(VDD12) IC3.20(VDD13) R38.1 U2.3(OUT)
VCC7A: C15.1 C31.1 C35.1 C37.1 C99.1 IC2.5(VS1+) IC2.6(VS2+) IC2.7(VS3+) IC2.8(VS4+) IC2.12(P\D\) IC4.5(VS1+) IC4.6(VS2+) IC4.7(VS3+) IC4.8(VS4+) IC4.12(P\D\) R37.1 U1.3(OUT) U2.1(EN) U2.2(IN) U3.2(VIN)
VCC12: C33.2 C34.2 C42.1 C43.1 P1.1 R41.1 U1.1(EN) U1.2(IN) U4.2(VIN)
0AD_IN+: C12.2 C13.1 IC1.23(IN+) R16.2
0AD_IN-: C10.2 C12.1 IC1.22(IN-) R9.2
0CLK+: IC1.17(CLK+) IC5.77(IO_L01P_0/VREF_0) J1.1 R6.1
0CLK-: IC1.16(CLK-) IC5.78(IO_L01N_0) J1.2 R6.2
0CLK_OUT: J17.6 U12.3(1Y)
0CNV+: IC1.9(CNV+) IC5.88(IO_L04P_0/GCLK8) J2.1 R7.2
0CNV-: IC1.8(CNV-) IC5.89(IO_L04N_0/GCLK9) J2.2 R7.1
0D+: IC1.11(D+) IC5.85(IO_L03P_0/GCLK6) J3.1 R79.2
0D-: IC1.10(D-) IC5.86(IO_L03N_0/GCLK7) J3.2 R79.1
0DCO+: IC1.15(DCO+) IC5.83(IO_L02P_0/GCLK4) J4.1 R80.2
0DCO-: IC1.14(DCO-) IC5.84(IO_L02N_0/GCLK5) J4.2 R80.1
0DIFF_IN+: J5.1 J6.1(CENTER) J8.1 R10.1
0DIFF_IN-: J5.2 J7.1(CENTER) J8.2 R13.1
0RST_OUT: J17.1 U11.3(1Y)
0TRI_IN: J17.7 U13.2(1A)
0TRI_OUT: IC5.6(IO_L02N_3) U13.3(1Y)
1AD_IN+: C28.2 C29.1 IC3.23(IN+) R34.2
1AD_IN-: C26.2 C28.1 IC3.22(IN-) R27.2
1CLK+: IC3.17(CLK+) IC5.56(IO_L01P_1) J9.1 R24.1
1CLK-: IC3.16(CLK-) IC5.57(IO_L01N_1) J9.2 R24.2
1CLK_OUT: J17.5 U12.6(2Y)
1CNV+: IC3.9(CNV+) IC5.64(IO_L04P_1/IRDY1/RHCLK6) J10.1 R25.2
1CNV-: IC3.8(CNV-) IC5.65(IO_L04N_1/RHCLK7) J10.2 R25.1
1D+: IC3.11(D+) IC5.61(IO_L03P_1/RHCLK2) J11.1 R81.2
1D-: IC3.10(D-) IC5.62(IO_L03N/TRDY1/RHCLK3) J11.2 R81.1
1DCO+: IC3.15(DCO+) IC5.59(IO_L02P_1/RHCLK0) J12.1 R82.2
1DCO-: IC3.14(DCO-) IC5.60(IO_L02N_1RHCLK1) J12.2 R82.1
1DIFF_IN+: J8.5 J13.1 J14.1(CENTER) R28.1
1DIFF_IN-: J8.6 J13.2 J15.1(CENTER) R31.1
1RST_OUT: J17.3 U11.6(2Y)
1TRI_IN: J17.9 U13.5(2A)
1TRI_OUT: IC5.5(IO_L02P_3) U13.6(2Y)
CCLK: IC5.53(IO_L12N_2/CCLK) R61.2
CF_IN: IC5.16(IO_L05N_3/LHCLK7) U11.12(4A)
CF_OE: IC5.19(IO_L06P_3) U11.13(4O\E\)
CF_OUT: J17.2 U11.11(4Y)
CLK_IN: IC5.10(IO_L03N_3/LHCLK1) U12.2(1A) U12.5(2A)
CLK_OE: IC5.12(IO_L04P_3/LHCLK2) U12.1(1O\E\) U12.4(2O\E\)
CLKOUT#: IC5.40(IO_L08P_2GCLK14) IC6.29(ACBUS5)
D0: IC5.50(IO_L01P_2/D2) IC6.13(ADBUS0)
D1: IC5.49(IO_L01N_2/D3) IC6.14(ADBUS1)
D2: IC5.44(IO_L09N_2/GCLK1) IC6.15(ADBUS2)
D3: IC5.43(IO_L09P_2/GCLK0) IC6.16(ADBUS3)
D4: IC5.41(IO_L08N_2/GCLK15) IC6.17(ADBUS4)
D5: IC5.37(IO_L07P_2/D4) IC6.18(ADBUS5)
D6: IC5.36(IO_L07P_2/D5) IC6.19(ADBUS6)
D7: IC5.35(IO_L06N_2/D6) IC6.20(ADBUS7)
DONE: IC5.54(DONE) R60.2 R69.1
EECLK: IC6.44(EECLK) R77.2 U9.2(CLK)
EECS: IC6.45(EECS) R76.2 U9.1(CS)
EEDATA: IC6.43(EEDATA) R70.1 U9.3(DI)
EN0: IC1.4(EN0) IC3.4(EN0) R2.2
EN1: IC1.5(EN1) IC3.5(EN1) R3.2
EN2: IC1.6(EN2) IC3.6(EN2) R4.2
EN3: IC1.7(EN3) IC3.7(EN3) R5.2
FT_RST: IC5.39(IP_2/VREF_2) IC6.34(R\E\S\E\T\) R83.2 R84.2
INIT: J16.5
INIT_B: D6.1(CATHODE) IC5.48(IO_L10P_2/INIT_B)
M0: IC5.25(IO_L01N_2/M0) R52.2
M1: IC5.24(IO_L02P_2/M2) R51.2
M2: IC5.23(IO_L01P_2M1) R50.2
MISO: IC5.51(IO_L12P_2/D0/DIN/MISO) R65.1
PROG_B: IC5.100(PRO_B) R59.2 S1.1 S1.3
PWRSAV#: IC5.29(IO_L03N_2/VS2) IC6.30(ACBUS6)
RD#: IC5.32(IO_L05P_2) IC6.26(ACBUS2)
REFIN: IC1.3(REFIN) IC3.3(REFIN) R1.1 R19.1
RST_IN: IC5.13(IO_L04N_3/IRDY2/LHCLK3) U11.2(1A) U11.5(2A)
RST_OE: IC5.15(IO_L05P_3/TRDY2/LHCLK6) U11.1(1O\E\) U11.4(2O\E\)
RXF#: IC5.34(IO_L06P_2/D7) IC6.21(ACBUS0)
SIWU#: IC5.30(IO_L04P_2/VS1) IC6.28(ACBUS4)
TCK: J16.4 R66.2
TDI: J16.7 R63.1
TDO: J16.6 R64.1
TMS: J16.9 R62.1
TRI_OE: IC5.9(IO_L03P_3/LHCLK0) U13.1(1O\E\) U13.4(2O\E\)
TXE#: IC5.33(IO_L05N_2) IC6.25(ACBUS1)
VREF4: C1.1 C2.1 C17.1 C18.1 C38.1 IC1.29(REF1) IC1.30(REF2) IC1.31(REF3) IC1.32(REF4) IC3.29(REF1) IC3.30(REF2) IC3.31(REF3) IC3.32(REF4) U3.7(VOUT)
WR#: IC5.31(IO_L04N_2/VS0) IC6.27(ACBUS3)
XTAIL2_OUT: C104.1 IC5.90(IO_0/GCLK11) R85.2
N04213: IC2.4(FB+) R15.2
N04222: IC2.3(IN-) R14.2 R15.1
N04242: C14.1 R13.2 R14.1 R18.1
N04254: C11.2 C97.2 R10.2 R11.1
N04258: IC2.2(IN+) R11.2 R12.1
N04262: IC2.1(FB-) R12.2
N04589: C14.2 R17.1
N05221: IC2.10(OUT+) R16.1
N05236: IC2.11(OUT-) R9.1
N07006: C75.1 C77.1 IC6.8(VPLL) L2.2
N07019: C78.1 C79.1 IC6.3(VPHY) L3.2
N07539: C88.1 IC6.38(VCCORE)
N07557: C89.1 IC6.37(VCCA)
N09249: IC6.6(DM) R72.2
N09253: IC6.7(DP) R73.2
N09257: R72.1 U10.2(D-)
N09261: R73.1 U10.3(D+)
N09333: C90.2 R75.2 U10.M1 U10.M2
N09549: IC6.5(REF) R74.2
N10001: R78.1 XTAL1.3(OUT)
N10014: C92.1 IC6.1(XCSI) R78.2
N10649: R70.2 R71.2 U9.4(DO)
N14805: R37.2 R39.1 U1.4(ADJ)
N15646: R38.2 R40.1 U2.4(ADJ)
N16666: R41.2 R44.1 U4.3(EN)
N16724: C39.1 U4.1(BOOT)
N16752: C39.2 D1.1(K) L1.1 U4.8(PH)
N17090: C44.1 C45.1 U4.6(COMP)
N17111: C45.2 R43.1
N17168: R42.2 R45.1 U4.5(VSNS)
N17255: C46.1 U4.4(SS)
N23502: IC5.99(IO_L06N_0/PUDC_B) R67.1
N23562: IC5.1(TMS) R62.2
N23566: IC5.2(TDI) R63.2
N23576: IC5.75(TDO) R64.2
N23580: IC5.76(TCK) R66.1
N23690: IC5.27(IO_L02N_2/CSO_B) R56.1
N23749: IC5.46(IO_2/MOSI/CSI_B) R57.1
N23777: R57.2 U8.5(D)
N23943: R65.2 U8.2(Q)
N24047: R53.2 U8.3(W\)
N24069: R54.2 R56.2 U8.1(S\)
N24131: R55.1 U8.7(H\O\L\D)
N24787: R58.2 R61.1 U8.6(C)
N104745: D7.2(ANODE) R69.2
N156622: IC4.4(FB+) R33.2
N156630: IC4.3(IN-) R32.2 R33.1
N156646: C30.1 R31.2 R32.1 R36.1
N156654: C27.2 C98.2 R28.2 R29.1
N156658: IC4.2(IN+) R29.2 R30.1
N156662: IC4.1(FB-) R30.2
N156746: C30.2 R35.1
N156906: IC4.10(OUT+) R34.1
N156918: IC4.11(OUT-) R27.1
N184862: D3.2(A) R47.2
N184902: D2.2(A) R46.2
N199208: C97.1 R8.2
N200034: C98.1 R26.2
N205678: D4.2(A) R48.2
N206212: D4.1(K) IC5.98(IO_L06P_0/VREF_0)
N206548: IC5.70(IO_L05P_1) R5.1
N206550: IC5.71(IO_L05N_1) R4.1
N231911: D6.2(ANODE) R68.2
N274248: R84.1 U10.1(VCC)
N291976: D5.1(K) IC5.3(IO_L01P_3)
N292023: IC5.94(IO_L05N_0) R2.1
N292033: IC5.93(IO_L05P_0) R3.1
N292268: R85.1 XTAL2.3(OUT)
N789980: D2.1(K) IC5.73(IO_L06N_1)
N789981: D3.1(K) IC5.72(IO_L06P_1)
N2056701: D5.2(A) R49.2

Pads without a net: IC5 4 7 20 21 28 52 68 82 97; IC6 2 31 32 33; J16 3 8; U3 1 3 5 6 8; U9 7; U11 8 9 10; U12 7 8 9 10 11 12 13; U13 8 9 10 11 12 13

## Via types
v1: diameter 0.5, hole 0.3, TOP to BOTTOM, 299 vias

## Routing (per net, layer and track width the routed paths; a pad name or vN(x,y) marks a point on that pad's centre or on a via; arc(x,y) is an arc through that point)
0VCM: length 13.8
  TOP w0.203: v1(49.2,73.86) 49.14,73.86 49.02,73.75 IC1.21 ; IC2.9 51.89,82.73 51.69,82.53 C16.1 49.19,82.52 v1(49.19,81.5)
  BOTTOM w0.254: v1(49.2,73.86) 49.2,81.49 v1(49.19,81.5)
1VCM: length 15.8
  TOP w0.203: v1(65.61,60.96) 65.4,60.75 IC3.21 ; IC4.9 71.09,70.08 70.71,69.7 68.26,69.7 67.85,69.29 C32.1 67.84,68.35 v1(66.73,68.35)
  BOTTOM w0.254: v1(65.61,60.96) 65.61,67.23 v1(66.73,68.35)
GND: length 201.2
  TOP w0.254: IC5.42 v1(39.5,38.31) ; IC6.22 v1(26.91,22.78) ; v1(34.54,50.22) 34.54,50.71 34,51.25 IC5.95 ; IC5.63 v1(43.69,44.5) ; D7.1 v1(58.49,39.58) ; IC5.18 v1(31.31,42) ; IC5.69 v1(43.69,47.5) ; v1(36.7,50.52) 36,51.22 IC5.91 ; IC6.41 v1(21.75,21.78) ; IC3.33 61.75,60.25 IC3.13 ; v1(64.9,62.69) 64.46,62.25 IC3.24 ; IC5.47 v1(42,35.48) ; v1(44.35,66.88) 44.9,67.43 C9.2 ; IC1.24 47.51,75.26 47.98,75.26 48.36,75.64 v1(48.36,76.1) ; IC6.48 v1(21.12,18.28) ; IC5.58 v1(43.69,42) ; IC6.10 v1(25.77,18.77) ; IC6.4 v1(22.77,18.14) ; IC6.11 v1(26.27,18.14) ; IC6.35 v1(21.77,23.3) ; IC1.13 45.25,73.25 IC1.33 ; IC5.8 v1(31.31,47) ; IC5.80 v1(41.5,50.69) ; IC5.74 v1(43.69,50) ; IC5.14 v1(31.31,44) ; R19.2 v1(53.28,61.57) ; IC6.47 v1(21.75,18.78) ; U8.4 v1(74.29,33.93) ; IC6.23 v1(26.28,23.28) ; IC6.36 v1(21.27,23.93) ; IC5.87 v1(38,50.69) ; IC6.9 v1(25.27,18.14) ; C53.2 v1(72.24,45.16) ; IC6.42 v1(21.12,21.28)
  TOP w0.508: C52.2 v1(66.45,27.45) ; C49.2 v1(53.58,27.1) ; XTAL1.2 v1(8.58,10.11) ; C78.2 v1(18.1,8.62) ; C17.2 v1(58.03,68.69) ; U11.7 v1(19.72,63.19) ; C81.2 v1(14.35,18.87) ; C26.1 v1(74.89,66.85) ; C46.2 v1(53.12,2.63) ; R8.1 v1(57.41,92.37) ; C41.2 v1(87.32,18.62) ; C85.2 v1(12.75,25.3) ; C24.2 v1(70.28,58.15) ; R17.2 v1(48.42,92.3) ; C43.2 v1(52.78,13.55) ; C44.2 v1(64.36,9.93) ; U1.7 v1(94.52,33.52) ; C104.2 v1(34.4,57.14) ; C101.2 v1(48.74,20.11) ; R83.1 v1(20.41,30) ; C4.1 v1(40.27,78.39) ; C22.1 v1(70.25,61.58) ; C16.2 v1(46.86,82.53) ; C84.2 v1(12.75,26.8) ; C90.1 v1(40.71,18.36) ; C48.2 v1(75.84,20.11) ; C32.2 v1(67.85,66.03) ; R39.2 v1(84.74,30.98) ; C42.2 v1(50.9,13.55) ; R74.1 v1(21.1,8.62) ; C6.1 v1(52.93,71.98) ; R44.2 v1(51.61,2.62) ; C23.1 v1(70.28,59.53) ; C5.1 v1(38.97,78.39) ; C40.2 v1(87.29,22.35) ; C75.2 v1(27.66,8.67) ; R50.1 v1(12.75,39.5) ; 54.79,84.89 v1(55.3,84.89) ; 74.04,72.11 v1(74.5,72.11) ; U1.6 v1(94.52,32.25) ; C89.2 v1(13.46,29.85) ; R26.1 v1(75.99,77.31) ; U3.4 v1(88.49,57.96) ; C19.2 v1(63.16,68.36) ; C96.2 v1(10.94,81.34) ; U9.5 v1(3.33,28.91) ; 45.75,76.58 v1(45.75,77.14) ; C13.2 v1(50.61,78.64) ; C27.1 v1(78.32,79.74) ; C21.1 v1(55.65,66) ; C7.1 v1(52.93,73.26) ; U6.1 v1(71.24,23.43) ; C100.2 v1(83.66,52.66) ; R36.2 v1(65.09,77.2) ; C94.1 v1(10.35,57.9) ; R67.2 v1(29.04,53.8) ; U5.1 v1(46.42,23.31) ; C20.1 v1(56.97,66) ; C11.1 v1(59.73,88.62) ; U13.7 v1(19.92,86.61) ; R18.2 v1(46.1,88.63) ; S1.2 v1(3.72,36.42) ; C87.2 v1(12.75,23.8) ; S1.4 v1(4.92,45.88) ; C3.2 v1(46.42,80.6) ; C76.1 v1(1.42,29.12) ; C31.2 v1(66.14,72.04) ; R51.1 v1(12.76,37.97) ; C92.2 v1(10.84,12.6) ; R35.2 v1(68.38,75.75) ; XTAL2.2 v1(30.56,61.09) ; R43.2 v1(65.74,9.94) ; R75.1 v1(40.71,20.65) ; C47.2 v1(51.06,20.11) ; R40.2 v1(84.99,43.65) ; R45.2 v1(67.73,8.16) ; 62.1,63.53 v1(62.1,64.08) ; C33.1 v1(90.91,21.3) ; C102.2 v1(61.52,20.49) ; U2.5 v1(97.14,44.27) ; C1.2 v1(42.49,83.06) ; C10.1 v1(55.63,79.65) ; C34.1 v1(92.39,21.3) ; C36.2 v1(85,47.15) ; C38.2 v1(98.34,65.24) ; C77.2 v1(26.24,8.67) ; C95.1 v1(10.76,69.9) ; U2.8 v1(97.14,48.08) ; C29.2 v1(68.85,66.87) ; C105.2 v1(32.95,67.56) ; C2.2 v1(44.19,81.77) ; U1.5 v1(94.52,30.98) ; C8.2 v1(52.96,70.64) ; U7.1 v1(59.21,23.57) ; C50.2 v1(78.72,27.24) ; C79.2 v1(19.6,8.62) ; C88.2 v1(13.46,28.35) ; C15.2 v1(46.81,84.98) ; C99.2 v1(83.06,37.44) ; C35.2 v1(84.73,34.21) ; C18.2 v1(60.97,68.87) ; U2.7 v1(97.14,46.81) ; U2.6 v1(97.14,45.54) ; C25.2 v1(62.66,54.52) ; C103.2 v1(73.56,20.03) ; C80.2 v1(31.3,25.19) ; D1.2 v1(53.15,17.04) ; C51.2 v1(63.83,20.51) ; R1.2 v1(37.95,73.86) ; C86.2 v1(12.75,22.1) ; U4.7 v1(62.7,9.16) ; U1.8 v1(94.52,34.79) ; C93.2 v1(6.49,9.47) ; C37.2 v1(85.09,60.5) ; C82.2 v1(25.92,14.06)
  BOTTOM w0.254: v1(33.5,54.66) 33.5,54.66 C58.2 ; C65.2 v1(27.93,40) ; C71.2 28.12,42.96 v1(27.51,42.34) ; C66.2 v1(30.57,35.78) ; v1(48.44,46.88) 48.44,46.33 47.61,45.5 C72.2 ; v1(37.67,34.67) 37.55,34.79 C74.2 ; C56.2 28.75,46.81 v1(28.4,47.17) ; C63.2 v1(35.84,43.09) ; C69.2 v1(39.32,43.09) ; C62.2 v1(37.37,46.77) ; C59.2 v1(47.34,47) ; v1(35.74,54.74) 35.74,54.43 35.5,54.19 C55.2 ; C57.2 43.62,53.2 v1(44.07,53.64) ; C73.2 v1(41,54.08) ; v1(41.4,34.75) 41,35.15 41,35.8 C64.2 ; C54.2 v1(51.12,40.5) ; C70.2 v1(34.26,46.77)
  vias: v1(44.09,72.62) v1(44.2,74.4) v1(45.85,74.45) v1(45.9,72.57) v1(60.63,61.37) v1(60.56,59.56) v1(62.28,61.37) v1(62.34,59.63)
VCC1V2: length 23.7
  TOP w0.254: IC5.17 30.82,42.5 v1(31.29,42.98) ; IC5.38 v1(37.5,38.22) ; IC5.81 41,51.08 v1(40.54,50.62) ; IC5.66 43.43,46 v1(42.93,45.5)
  TOP w0.508: U7.2 61.52,25.18 C102.1 60.59,22.82 v1(60.58,22.81) ; v1(66.45,32.41) C52.1 66.39,31 U7.4
  BOTTOM w0.254: C71.1 30.07,42.98 v1(31.29,42.98) ; v1(37.5,38.22) 37.5,37.2 C74.1 ; v1(40.54,50.62) 41,51.08 C73.1 ; C69.1 v1(39.32,46.77) ; C72.1 v1(42.93,45.5)
VCC1V8: length 81.4
  TOP w0.254: C3.1 46.46,78.24 46.46,77.27 46.75,76.97 IC1.25 ; v1(33.5,50.55) 33.5,50.55 IC5.96 ; v1(67.95,57.38) C24.1 66.56,58.15 65.46,59.25 IC3.18 ; v1(42.5,50.5) 42.5,50.54 42,51.04 IC5.79 ; IC1.18 48.17,72.25 49.78,70.64 C8.1 50.62,69.83 v1(50.62,69.82) ; v1(44.12,68.61) 44.12,68.96 44.41,69.25 C9.1 44.9,70.33 44.77,70.46 44.77,70.98 IC1.12 ; IC1.2 39.37,74.75 38.97,75.15 C5.2 v1(38.16,76.05) ; v1(54.88,63.66) C21.2 55.65,63.66 55.65,63.02 56.69,61.98 57.63,61.98 57.86,61.75 IC3.2 ; v1(62.43,55.4) 61.91,55.92 C25.1 61.59,55.97 61.59,56.87 61.25,57.22 IC3.12 ; IC5.67 v1(43.03,46.5) ; C19.1 63.16,64.22 63.25,64.13 IC3.25 ; R49.1 v1(24.05,57.99) ; R48.1 v1(27.28,64.06)
  TOP w0.508: R46.1 v1(77.06,51.49) ; v1(78.72,32.23) C50.1 78.71,30.86 U6.4 ; v1(64.31,63.88) 64.31,65.53 63.89,65.95 C19.1 ; v1(72.53,22.36) C103.1 73.56,25.04 U6.2 ; C3.1 v1(47.41,78.27) ; R47.1 v1(77.11,49.9)
  BOTTOM w0.254: C63.1 v1(35.84,46.77) ; v1(33.5,50.55) 33.5,50.55 C58.1 ; v1(27.28,64.06) 25.91,64.06 24.05,62.21 v1(24.05,57.99) v1(34.06,57.99) ; v1(43.03,46.5) 43.66,46.5 44.16,47 C59.1 ; v1(42.5,50.5) C57.1
VCC3V3: length 95.1
  TOP w0.254: IC6.40 17.07,22.28 ; IC5.45 40.98,36.82 40.98,37.86 40.46,38.38 40.46,38.91 v1(40.51,38.96) ; IC6.24 30.35,23.78 C80.1 v1(31.29,23.79) ; v1(43.83,40.5) IC5.55 ; C81.1 17.85,18.87 18.27,19.28 IC6.46 ; v1(31.42,45.5) IC5.11 ; v1(28.26,15) C82.1 26.77,15.55 IC6.12 ; IC5.22 v1(31.16,40) ; IC6.39 16.99,22.78 ; IC5.26 v1(31.5,38.17) ; U9.8 v1(3.33,25.1) ; IC5.92 v1(35.5,50.59)
  TOP w0.381: R58.1 62.83,41.35 65.01,41.35 68.82,45.16 69.7,45.16 C53.1 ; U8.8 69.42,42.45 69.69,42.71 R55.2
  TOP w0.508: R54.1 v1(60.91,34.92) ; R55.2 69.7,43.78 C53.1 ; C86.1 16.33,22.1 ; L3.1 v1(16.14,8.54) ; R59.1 v1(16.16,36.42) ; 16.99,21.87 v1(17.42,21.44) ; R71.1 v1(5.74,19.53) ; R58.1 v1(60.91,40.44) ; v1(53.58,32.05) C49.1 53.54,30.74 U5.4 ; C84.1 16.15,26.8 ; v1(1.42,25.88) C76.2 1.43,26.78 U9.6 ; C81.1 v1(16.76,17.98) ; C85.1 16.18,25.3 ; R53.1 v1(60.9,37.69) ; R68.1 v1(47.53,35.75) ; U13.14 10.96,78.99 C96.1 v1(10.94,78.16) ; U5.2 48.74,24.92 C101.1 v1(47.8,22.44) ; XTAL1.1 v1(2.48,9.48) 4.15,9.48 C93.1 ; XTAL1.4 v1(2.48,17.23) ; L2.1 v1(29.16,8.66) ; R77.1 v1(7.28,19.52) ; R76.1 v1(8.72,19.52) ; R52.1 v1(26.9,32.52) ; C87.1 16.33,23.8 ; v1(30.54,68.62) C105.1 30.56,67.54 XTAL2.1 XTAL2.4 ; R60.1 v1(53.17,40.99)
  BOTTOM w0.254: v1(31.5,38.17) C66.1 ; C56.1 v1(31.42,45.5) ; C64.1 41,38.48 v1(40.51,38.96) ; C62.1 v1(37.37,43.09) ; C70.1 v1(34.26,43.09) ; v1(31.16,40) C65.1 ; C54.1 v1(43.83,40.5) ; v1(35.5,50.59) C55.1
VCC5: length 41.6
  TOP w0.508: U12.14 13.15,67.56 C95.2 v1(10.76,66.7) ; R42.1 70.04,11.37 71.51,12.84 L1.2 76.49,17.39 77.72,18.62 C41.1 80.52,22.33 C40.1 v1(80.49,24.56) ; U5.3 51.06,24.9 C47.1 v1(51.99,22.44) ; v1(76.85,22.44) C48.1 U6.3 ; U7.3 63.83,25.17 C51.1 v1(64.8,22.84) ; v1(10.35,54.69) C94.2 U11.14
VCC5A: length 36.7
  TOP w0.254: IC3.1 58.14,62.25 57.81,62.59 57.33,62.59 56.97,62.94 C20.2 v1(57.75,63.67) ; v1(40.93,76.06) C4.2 40.27,75.58 40.6,75.25 IC1.1 ; IC1.19 48.41,72.75 49.17,71.98 C6.2 C7.2 ; C7.2 50.59,73.25 IC1.20 ; C7.2 v1(50.6,74.12) ; v1(67.95,60.48) C23.2 66.48,59.53 66.26,59.75 IC3.19 ; IC3.20 65.86,60.25 67.2,61.58 C22.2 v1(67.92,62.51)
  TOP w0.508: U2.3 87.37,45.54 R38.1 87.35,47.13 C36.1 87.33,49.09 87.08,49.34 C100.1 v1(87.08,52.7)
VCC7A: length 26.8
  TOP w0.203: IC4.12 72.59,70.05 v1(73.3,69.34) ; U2.1 v1(89.08,48.08) ; IC4.7 69.3,71.95 ; v1(53.67,82.52) 53.39,82.8 IC2.12 ; IC4.8 69.35,71.45 ; IC4.6 69.31,72.45 ; U2.2 v1(89.08,46.81) ; IC4.5 69.32,72.95
  TOP w0.254: C35.1 85.69,32.84 R37.1 ; 50.14,84.61 50.16,84.62 IC2.7 ; 50.16,85.62 50.17,85.62 IC2.5 ; 50.11,85.12 50.12,85.12 IC2.6 ; 50.14,84.12 IC2.8
  TOP w0.508: U1.3 v1(89.12,32.25) ; 68.81,73.15 v1(68.81,73.84) ; 49.53,85.8 v1(49.53,86.49) ; U3.2 C37.1 v1(87.42,61.67) ; v1(89.2,37.44) C99.1 87.06,36.71 C35.1
VCC12: length 10.9
  TOP w0.508: 52.2,8.79 v1(52.2,7.92) ; C34.2 92.39,18.89 C33.2 ; U4.2 v1(57.3,9.16) ; U1.1 v1(89.12,34.79) ; U1.2 v1(89.12,33.52)
  TOP w0.635: P1.1 92.39,14.37 C34.2
0AD_IN+: length 10.5
  TOP w0.203: IC1.23 48.33,74.75 48.35,74.73 48.55,74.73 50,76.17 51.51,76.17 51.94,76.61 51.94,77.71 C12.2 52,79.64 C13.1 52.01,79.86 R16.2
0AD_IN-: length 11.7
  TOP w0.203: R9.2 53.3,79.88 C10.2 53.3,77.85 C12.1 53.39,77.41 51.7,75.72 50.19,75.72 48.74,74.27 48.35,74.27 48.33,74.25 IC1.22
0CLK+: length 25.6
  TOP w0.203: IC1.17 48.44,70.81 R6.1 49.13,68.97 49.4,68.7 49.4,63.72 48.68,62.99 47.71,62.99 47.46,62.74 47.46,62.54 J1.1 48.5,57.89 46.06,55.45 44.83,55.45 42.98,53.6 42.98,53.4 43,53.38 IC5.77
0CLK-: length 25.1
  TOP w0.203: IC5.78 42.5,53.38 42.52,53.4 42.52,53.79 44.64,55.91 45.87,55.91 46.89,56.92 46.89,60.57 J1.2 47,62.54 47,62.93 47.52,63.45 48.49,63.45 48.95,63.91 48.95,67.08 R6.2 47.05,69.66 47.52,70.13 47.52,70.69 47.2,71 IC1.16
0CLK_OUT: length 20.9
  TOP w0.203: U12.3 v1(19.91,70.12)
  BOTTOM w0.203: J17.6 3.73,73.81 16.22,73.81 v1(19.91,70.12)
0CNV+: length 21.6
  TOP w0.203: IC5.88 37.5,53.38 38.07,53.95 38.07,60.93 38.76,61.61 38.76,63.57 J2.1 40.61,65.42 40.61,65.68 41.49,66.55 41.49,68.29 R7.2 42.2,70.62 42.58,71 IC1.9
0CNV-: length 22.7
  TOP w0.203: IC1.8 41.82,71.75 41.05,70.98 41.05,70.48 40.8,70.24 R7.1 40.8,68.15 J2.2 38.3,64.45 38.3,61.8 37.62,61.12 37.62,54.14 37.02,53.55 37.02,53.4 37,53.38 IC5.89
0D+: length 21
  TOP w0.203: IC5.85 39,53.38 38.98,53.4 38.98,54.66 41.79,57.47 R79.2 41.79,60.79 J3.1 42.5,66.11 43.41,67.02 43.41,69.1 44.21,69.9 44.21,70.96 IC1.11
0D-: length 21.3
  TOP w0.203: IC1.10 43.75,70.09 42.95,69.29 42.95,67.21 41.88,66.14 41.88,63.42 J3.2 40.39,61.07 R79.1 40.39,56.8 38.5,54.91 IC5.86
0DCO+: length 24.2
  TOP w0.203: IC1.15 46.25,70.7 46.26,70.69 46.26,69.72 46.25,69.71 46.25,67.02 47.29,65.98 J4.1 46.31,65 46.08,64.77 46.08,63.42 44.86,62.21 R80.2 44.86,56.93 42.85,54.91 40.57,54.91 39.98,54.32 39.98,53.4 40,53.38 IC5.83
0DCO-: length 22.8
  TOP w0.203: IC1.14 45.75,70.55 45.8,70.5 45.8,67.04 44.75,65.98 J4.2 44.75,63.64 44.25,63.14 44.25,59.61 R80.1 43.47,56.18 42.66,55.37 40.39,55.37 39.52,54.51 39.52,53.4 39.5,53.38 IC5.84
0DIFF_IN+: length 47.1
  TOP w0.203: J5.1 53.96,96.27 56.63,98.93 74.64,98.93 78.57,95 J8.1 ; J5.1 60.59,95.29 61.17,94.71 J6.1 ; J5.1 52.98,95.29 52.88,95.18 52.88,92.64 53.47,92.04 R10.1
0DIFF_IN-: length 49.3
  TOP w0.203: J5.2 45.3,95.29 44.72,94.71 J7.1 ; J5.2 51.42,96.27 54.54,99.39 74.83,99.39 77.72,96.49 78.95,96.49 J8.2 ; J5.2 52.4,95.29 52.42,95.27 52.42,92.62 51.82,92.02 R13.1
0RST_OUT: length 20.9
  TOP w0.203: U11.3 v1(19.68,58.11)
  BOTTOM w0.203: v1(19.68,58.11) 17.36,60.43 14.57,60.43 J17.1
0TRI_IN: length 17.5
  TOP w0.203: U13.2 v1(20.01,80.26)
  BOTTOM w0.203: J17.7 10.7,77.62 10.71,77.6 11.17,77.6 11.19,77.62 17.37,77.62 v1(20.01,80.26)
0TRI_OUT: length 43.5
  TOP w0.203: IC5.6 23.37,48 22.63,48.74 22.63,80.21 21.31,81.53 U13.3
1AD_IN+: length 12.9
  TOP w0.203: R34.2 71.19,67 C29.1 71.17,66.86 C28.2 71.15,65.18 71.15,64.24 70.43,63.52 66.67,63.52 64.9,61.75 IC3.23
1AD_IN-: length 14.1
  TOP w0.203: IC3.22 65.05,61.25 66.86,63.06 70.62,63.06 72.57,65.01 C28.1 72.55,65.23 C26.2 72.55,67.03 R27.2
1CLK+: length 41.9
  TOP w0.203: IC3.17 64.32,58.43 64.32,58 64.59,57.73 66.32,57.73 67.21,56.84 R24.1 67.89,55.35 67.89,50.68 67.12,49.91 66.15,49.91 65.94,49.7 65.94,49.17 J9.1 66.98,47.73 66.59,47.33 65.89,46.63 65.89,43.45 64.63,42.19 51.24,42.19 50.1,41.04 45.24,41.04 IC5.56
1CLK-: length 41.1
  TOP w0.203: IC3.16 63.57,57.68 64,57.68 64.4,57.28 66.12,57.28 66.32,57.07 66.32,56.53 R24.2 65.82,55.75 67.44,54.13 67.44,50.87 66.93,50.37 65.96,50.37 65.49,49.89 65.49,49.17 J9.2 64.44,47.57 65.43,46.58 65.43,43.64 64.44,42.65 51.05,42.65 49.91,41.5 IC5.57
1CLK_OUT: length 15
  TOP w0.203: U12.6 16.67,73.93 14.31,76.29 6.21,76.29 J17.5
1CNV+: length 26.1
  TOP w0.203: IC5.64 46.38,45 46.4,45.02 49.66,45.02 51.01,46.38 55.38,46.38 56.06,47.05 56.06,49.39 56.5,49.83 57.87,49.83 58.52,50.48 58.52,51.35 J10.1 58.49,53.4 58.49,54.81 58.94,55.26 R25.2 58.94,57.65 59.3,58 IC3.9
1CNV-: length 26.3
  TOP w0.203: IC5.65 46.38,45.5 46.4,45.48 49.47,45.48 50.83,46.84 55.19,46.84 55.6,47.24 55.6,49.58 56.31,50.29 57.68,50.29 58.06,50.67 58.06,51.29 J10.2 58.03,53.4 58.03,54.78 57.55,55.26 R25.1 57.55,57.55 58.75,58.75 IC3.8
1D+: length 29.4
  TOP w0.203: IC3.11 60.75,54.07 61.62,53.2 61.62,50.36 60.68,49.42 J11.1 60.68,47.09 59.91,46.32 R81.2 59.91,44.95 59.88,44.91 51.1,44.91 49.68,43.5 IC5.61
1D-: length 29
  TOP w0.203: IC5.62 49.54,44 51.17,45.64 R81.1 58.51,46.32 58.14,46.7 J11.2 59.18,49.19 59.18,49.81 59.56,50.19 60.81,50.19 61.16,50.55 61.16,53.01 60.09,54.08 60.09,56.49 60.25,56.65 IC3.10
1DCO+: length 34.7
  TOP w0.203: IC3.15 62.75,56.72 64.71,54.76 65.79,53.68 J12.1 64.67,51.24 64.67,50.46 63.49,49.28 R82.2 63.49,44.75 62.22,43.48 50.91,43.48 49.93,42.5 IC5.59
1DCO-: length 33.4
  TOP w0.203: IC3.14 62.29,57.96 62.29,56.53 64.25,54.57 64.25,53.37 J12.2 64.21,51.4 64.21,50.65 62.09,48.52 R82.1 62.09,44.75 61.28,43.94 50.72,43.94 49.78,43 IC5.60
1DIFF_IN+: length 52.8
  TOP w0.203: J14.1 94.43,78.87 88.88,84.42 88.88,85.54 86.53,87.9 86.53,93.55 85.83,94.25 J8.5 84.23,94.15 84.23,90.22 83.11,89.1 74.04,89.1 72.11,87.17 72.11,84.9 J13.1 72.15,82.84 72.15,80.03 72.68,79.49 R28.1
1DIFF_IN-: length 48.8
  TOP w0.203: J15.1 87.94,87.13 86.98,88.09 86.98,93.74 86.33,94.39 86.33,96.29 J8.6 83.77,96.23 83.77,90.41 82.92,89.56 73.86,89.56 71.66,87.36 71.66,84.9 J13.2 71.69,82.78 71.69,80 71.15,79.47 R31.1
  BOTTOM w0.203: J15.1 94.39,87.12
1RST_OUT: length 20.3
  TOP w0.203: J17.3 7.01,70.53 7.01,66.17 8.81,64.36 14.17,64.36 16.62,61.92 U11.6
1TRI_IN: length 20.5
  TOP w0.203: U13.5 16.66,84.07 16.15,83.57 16.15,78.41 15.19,77.44 7.72,77.44 J17.9
1TRI_OUT: length 47
  TOP w0.203: IC5.5 23.86,48.5 23.16,49.2 23.16,84.2 22.03,85.34 U13.6
CCLK: length 17.1
  TOP w0.203: R61.2 60.29,39.08 59.99,38.79 48.21,38.79 47.49,39.5 IC5.53
CF_IN: length 28.3
  TOP w0.203: IC5.16 20.86,43 15.47,48.39 15.47,57.28 14.64,58.11 U11.12
CF_OE: length 34
  TOP w0.203: U11.13 14.1,56.84 14.48,56.46 14.48,54.23 13.26,53.01 13.26,41.99 14.5,40.74 27.05,40.74 27.81,41.5 IC5.19
CF_OUT: length 19.5
  TOP w0.203: J17.2 2.46,62.16 5.24,59.38 U11.11
CLK_IN: length 39.3
  TOP w0.203: U12.5 20.13,72.66 20.52,72.27 20.52,69.49 19.89,68.86 18.58,68.86 U12.2 19.04,68.85 21.56,66.32 21.56,46.79 22.35,46 IC5.10
CLK_OE: length 37.5
  TOP w0.203: U12.4 18.09,71.39 17.48,70.78 17.48,68.18 18.09,67.58 U12.1 19.04,67.58 20.98,65.64 20.98,45.8 21.77,45.01 29.79,45.01 IC5.12
CLKOUT#: length 25.3
  TOP w0.203: v1(25.07,28.6) 24.77,28.3 IC6.29 ; v1(38.05,28.85) 38.5,29.31 38.5,33.8 38.76,34.06 38.76,35.48 38.5,35.74 IC5.40
  BOTTOM w0.203: v1(38.05,28.85) 37.4,28.21 25.46,28.21 v1(25.07,28.6)
D0: length 28
  TOP w0.203: IC5.50 43.5,28.17 33.62,18.28 IC6.13
D1: length 27.2
  TOP w0.203: IC5.49 43,28.37 33.41,18.78 IC6.14
D2: length 25.5
  TOP w0.203: IC5.44 40.5,26.58 33.2,19.28 IC6.15
D3: length 24.7
  TOP w0.203: IC5.43 40,26.79 33,19.78 IC6.16
D4: length 23.8
  TOP w0.203: IC6.17 32.79,20.28 39.17,26.66 39.17,35.76 39,35.93 IC5.41
D5: length 22.2
  TOP w0.203: IC5.37 37,35.04 37,35.04 37,34.58 37,34.57 37,25.2 32.58,20.78 IC6.18
D6: length 21.4
  TOP w0.203: IC6.19 32.37,21.28 36.5,25.41 IC5.36
D7: length 20.6
  TOP w0.203: IC6.20 32.17,21.78 36,25.62 IC5.35
DONE: length 10.8
  TOP w0.203: R69.1 54.34,39.59 R60.2 50.45,39.59 50.04,40 IC5.54
EECLK: length 20.4
  TOP w0.203: IC6.44 11.39,20.28 10.77,20.9 10.77,24.82 10.07,25.51 U9.2 7.65,25.51 7.28,25.15 R77.2
EECS: length 14.4
  TOP w0.203: U9.1 8.73,21.84 R76.2 10.78,19.78 IC6.45
EEDATA: length 16.2
  TOP w0.203: U9.3 10.4,26.78 10.53,26.65 R70.1 11.61,22.17 13,20.78 IC6.43
EN0: length 43.1
  TOP w0.203: v1(57.48,60.75) IC3.4 ; R2.2 36.34,72.98 v1(36.35,72.97) 36.37,72.95 40.57,72.95 40.97,73.35 41.37,73.75 IC1.4
  BOTTOM w0.203: v1(36.35,72.97) 36.35,64.64 37.77,63.22 50.55,63.22 53.02,60.75 v1(57.48,60.75)
EN1: length 45.2
  TOP w0.203: v1(56.82,60.17) 58.01,60.17 58.09,60.25 IC3.5 ; R3.2 32.43,71.25 33.4,71.25 34.34,72.19 35.1,72.19 v1(35.13,72.21) 40.48,72.21 41.52,73.25 IC1.5
  BOTTOM w0.203: v1(35.13,72.21) 35.15,72.21 35.84,71.53 35.84,62.31 37.97,60.17 v1(56.82,60.17)
EN2: length 37.4
  TOP w0.203: R4.2 v1(51.73,57.53) 51.44,57.82 v1(51.44,65.1) ; IC1.6 41.59,72.75 40.5,71.65 v1(39.78,71.65) ; v1(56.18,59.61) 57.53,59.61 57.67,59.75 IC3.6
  BOTTOM w0.203: v1(51.44,65.1) 51.44,66.64 50.65,67.43 40.85,67.43 39.78,68.5 v1(39.78,71.65) ; v1(51.73,57.53) 53.81,59.61 v1(56.18,59.61)
EN3: length 34.9
  TOP w0.203: IC1.7 41.67,72.25 v1(40.4,70.98) ; v1(52.07,64.49) 52.07,60.12 53.25,58.94 v1(53.25,57.53) R5.2 ; IC3.7 57.93,59.25 57.68,59 v1(55.52,59)
  BOTTOM w0.203: v1(55.52,59) 54.73,59 v1(53.25,57.53) ; v1(52.07,64.49) 52.07,67.28 51.33,68.02 41.43,68.02 40.4,69.05 v1(40.4,70.98)
FT_RST: length 25.6
  TOP w0.203: IC6.34 22.27,26.99 22.76,27.48 22.76,28.71 R84.2 R83.2 23.85,30 24.46,30.61 v1(31.75,30.61) ; IC5.39 38,35.51 38.33,35.18 38.33,34.37 37.92,33.96 v1(37.92,32.84)
  BOTTOM w0.203: v1(31.75,30.61) 35.15,30.61 37.39,32.84 v1(37.92,32.84)
INIT_B: length 7.5
  TOP w0.203: IC5.48 v1(42.5,38) ; v1(47.09,37.21) 48.18,37.21 48.18,37.21 D6.1
  BOTTOM w0.203: v1(42.5,38) 46.3,38 v1(47.09,37.21)
M0: length 5.3
  TOP w0.203: R52.2 28.04,33.95 28.04,36.74 IC5.25
M1: length 15.1
  TOP w0.203: R51.2 27.72,37.97 28.75,39 IC5.24
M2: length 14.7
  TOP w0.203: IC5.23 28.22,39.5 28.16,39.45 27.71,39.45 27.65,39.5 R50.2
MISO: length 17.7
  TOP w0.203: IC5.51 47.92,38.5 48.32,38.1 58.27,38.1 60.12,36.25 61.91,36.25 R65.1
PROG_B: length 38.6
  TOP w0.203: IC5.100 31.5,52.2 v1(30.63,52.2) ; R59.2 13.09,36.42 13.09,36.42 S1.1 S1.3 v1(9.42,46.08)
  BOTTOM w0.203: v1(9.42,46.08) 24.51,46.08 v1(30.63,52.2)
PWRSAV#: length 19.5
  TOP w0.203: IC6.30 24.27,28.81 25.17,29.72 32.46,29.72 33,30.26 IC5.29
RD#: length 18.3
  TOP w0.203: IC5.32 34.5,29.7 32.71,27.91 27.09,27.91 26.27,27.08 IC6.26
REFIN: length 30.4
  TOP w0.203: R1.1 40.9,73.86 41.3,74.25 IC1.3 ; v1(55.7,61.52) 55.73,61.54 57.45,61.54 57.75,61.25 IC3.3
  BOTTOM w0.203: v1(40.26,73.84) 40.26,72.16 43.18,69.24 51.71,69.24 52.78,68.17 52.78,62.94 54.2,61.52 v1(55.7,61.52)
RST_IN: length 28.5
  TOP w0.203: 19.69,56.84 U11.2 ; 19.69,56.84 20.35,56.18 20.35,45.57 21.41,44.5 IC5.13 ; 19.69,56.84 20.35,57.5 20.35,60.12 19.82,60.65 U11.5
RST_OE: length 27.8
  TOP w0.203: U11.4 17.91,59.38 17.31,58.78 17.31,55.58 17.32,55.57 ; 17.32,55.57 U11.1 ; 17.32,55.57 17.32,53.52 19.46,51.38 19.46,45.42 21.37,43.5 IC5.15
RXF#: length 19.7
  TOP w0.203: IC5.34 35.5,25.82 31.96,22.28 IC6.21
SIWU#: length 18.5
  TOP w0.203: IC6.28 25.27,27.7 26.47,28.91 32.41,28.91 33.5,29.99 IC5.30
TCK: length 61.5
  TOP w0.203: v1(47.27,55.37) 47.27,53.6 R66.2
  BOTTOM w0.203: v1(47.27,55.37) 43.66,58.98 30.43,58.98 28.91,60.5 28.91,90.47 J16.4
TDI: length 48.4
  TOP w0.203: R63.1 25.34,86.42 J16.7
TDO: length 65.4
  TOP w0.203: R64.1 v1(48.85,54.66)
  BOTTOM w0.203: J16.6 27.91,86.39 27.91,60.43 29.77,58.57 39.9,58.57 43.81,54.66 v1(48.85,54.66)
TMS: length 54.3
  TOP w0.203: R62.1 v1(26.83,53.96)
  BOTTOM w0.203: J16.9 11.2,95.48 15.27,95.48 22.91,87.83 22.91,56.64 25.59,53.96 v1(26.83,53.96)
TRI_OE: length 47.1
  TOP w0.203: IC5.9 22.92,46.5 22.07,47.35 22.07,75.51 U13.1 17.51,78.99 17.51,82.8 U13.4
TXE#: length 17.3
  TOP w0.203: IC6.25 27.22,25.23 29.39,27.41 32.97,27.41 35,29.44 IC5.33
VREF4: length 103
  TOP w0.254: IC1.32 43.25,77.67 ; IC3.29 61.25,64.78 ; IC1.30 44.25,77.62 ; IC1.29 44.75,77.62 ; IC3.31 60.25,64.79 ; IC3.32 59.75,64.78 ; IC1.31 43.75,77.71 ; IC3.30 60.75,64.79
  TOP w0.508: v1(98.34,58.92) C38.1 98.33,60.5 U3.7 ; 58.14,66.7 56.79,68.05 56.79,70.13 v1(56.74,70.18) ; v1(40.46,83.79) 40.46,80.54 41.68,79.32
  BOTTOM w0.508: v1(40.46,83.79) 40.49,83.77 54.53,83.77 56.79,81.51 56.79,70.13 ; 56.79,70.13 56.79,69.62 ; 56.79,70.13 v1(56.74,70.18) 87.07,70.18 v1(98.34,58.92)
WR#: length 18.3
  TOP w0.203: IC6.27 25.77,27.39 26.78,28.41 32.52,28.41 34,29.89 IC5.31
XTAIL2_OUT: length 4.9
  TOP w0.203: C104.1 R85.2 36.5,55.54 IC5.90
N04213: length 3.1
  TOP w0.203: R15.2 50.43,87.38 51.15,86.66 51.16,86.66 51.45,86.37 IC2.4
N04222: length 3.8
  TOP w0.203: IC2.3 52.39,86.37 52.39,87.33 51.83,87.89 R15.1 R14.2
N04242: length 4.8
  TOP w0.203: R18.1 C14.1 50.41,90 R14.1 50.43,91.32 R13.2
N04254: length 5.8
  TOP w0.203: C11.2 57.41,88.64 C97.2 56.72,90.68 55.56,90.68 R11.1 54.87,90 R10.2
N04258: length 3.9
  TOP w0.203: IC2.2 52.89,87.3 53.51,87.91 R12.1 53.51,88.94 53.48,88.96 R11.2
N04262: length 3.1
  TOP w0.203: R12.2 54.9,87.43 53.85,86.37 IC2.1
N04589: length 1.4
  TOP w0.203: R17.1 47.02,90 C14.2
N05221: length 2.3
  TOP w0.203: IC2.10 52.39,83.37 52.39,82.32 52.01,81.94 R16.1
N05236: length 2.3
  TOP w0.203: IC2.11 52.89,82.32 53.27,81.94 R9.1
N07006: length 9.4
  TOP w0.203: IC6.8 24.77,13.72 26.24,12.24 C77.1 C75.1 L2.2
N07019: length 10.4
  TOP w0.203: L3.2 C78.1 C79.1 19.6,12.24 22.27,14.9 IC6.3
N07539: length 8.2
  TOP w0.203: IC6.38 18.6,23.28 17.98,23.9 17.98,27.38 17.01,28.35 C88.1
N07557: length 8.7
  TOP w0.203: IC6.37 19.82,27.5 17.47,29.85 C89.1
N09249: length 6.1
  TOP w0.203: IC6.6 23.77,11.64 R72.2
N09253: length 6
  TOP w0.203: R73.2 24.66,11.69 24.27,12.08 IC6.7
N09257: length 25.4
  TOP w0.203: R72.1 23.14,9.02 24.24,7.92 25.02,7.14 38.26,7.14 39.5,8.37 39.5,14.06 U10.2
N09261: length 20.8
  TOP w0.203: R73.1 24.66,8.14 25.21,7.59 38.07,7.59 38.49,8.01 U10.3
N09333: length 22.4
  TOP w0.508: U10.M2 45.45,10.42 C90.2 R75.2
  BOTTOM w0.508: U10.M1 U10.M2
N09549: length 6.8
  TOP w0.203: R74.2 21.1,12.52 23.27,14.68 IC6.5
N10001: length 2.3
  TOP w0.203: XTAL1.3 8.58,15.6 8.6,15.61 10.79,15.61 10.82,15.59 R78.1
N10014: length 12.2
  TOP w0.203: IC6.1 21.27,15.78 21.08,15.59 R78.2 C92.1
N10649: length 10.9
  TOP w0.203: R71.2 5.74,26.14 7.65,28.05 U9.4 11.61,28.05 R70.2
N14805: length 5
  TOP w0.254: U1.4 87.08,30.98 ; 87.08,30.98 R37.2 ; 87.08,30.98 R39.1
N15646: length 5.8
  TOP w0.254: R38.2 85.95,45.02 R40.1 88.43,43.65 89.05,44.27 U2.4
N16666: length 8.4
  TOP w0.254: R41.2 50.72,5.29 51.06,4.95 R44.1
  TOP w0.305: U4.3 53.82,7.89 51.61,5.69 R44.1
N16724: length 4.2
  TOP w0.305: C39.1 57.02,13.49 55.97,12.45 U4.1
N16752: length 31.6
  TOP w0.305: L1.1 62.78,2.94 59.46,6.25 59.46,9 60.9,10.43 U4.8 61.37,11.9 59.78,13.49 C39.2 59.1,17.04 D1.1
N17090: length 4.6
  TOP w0.305: U4.6 63.25,7.89 63.54,7.6 C44.1 64.36,6.17 C45.1
N17111: length 1.5
  TOP w0.305: C45.2 65.77,6.51 65.74,6.54 R43.1
N17168: length 13.3
  TOP w0.305: U4.5 61.37,5.35 61.87,4.85 67.32,4.85 67.73,5.26 R45.1 68.48,6.58 68.48,9.2 R42.2
N17255: length 3.5
  TOP w0.305: U4.4 54.78,6.62 C46.1
N23502: length 3.7
  TOP w0.203: IC5.99 32,52.2 32,54.08 31.27,54.81 R67.1
N23562: length 3.4
  TOP w0.203: IC5.1 28.55,50.5 27.52,51.53 R62.2
N23566: length 5.5
  TOP w0.203: IC5.2 26.24,50 25.34,50.9 R63.2
N23576: length 4.8
  TOP w0.203: R64.2 48.85,51.51 47.84,50.5 IC5.75
N23580: length 3.8
  TOP w0.203: IC5.76 43.5,52.2 47.27,52.2 R66.1
N23690: length 4.7
  TOP w0.203: R56.1 31.02,33.91 32,34.9 IC5.27
N23749: length 36.8
  TOP w0.203: v1(41.5,38.89) 41.5,36.8 IC5.46 ; v1(75.34,38.89) 75.34,39.75 R57.1
  BOTTOM w0.203: v1(41.5,38.89) v1(75.34,38.89)
N23777: length 2.1
  TOP w0.381: U8.5 75.32,41.13 R57.2
N23943: length 9.3
  TOP w0.203: U8.2 70.66,33.96 70.66,35.59 70,36.25 R65.2
N24047: length 11.7
  TOP w0.203: U8.3 72.01,33.97 72.01,36.4 70.72,37.69 R53.2
N24069: length 42
  TOP w0.203: v1(63.32,33.66) 63.32,34.91 R54.2 67.22,34.92 68.22,33.91 69.41,33.91 U8.1 ; R56.2 v1(30.43,32.52)
  BOTTOM w0.203: v1(63.32,33.66) 31.57,33.66 v1(30.43,32.52)
N24131: length 2.8
  TOP w0.203: U8.7 70.66,41.16 70.66,42.47 71.08,42.89 R55.1
N24787: length 11.8
  TOP w0.203: U8.6 71.96,39.83 71.65,39.52 67.67,39.52 66.75,40.44 R58.2 63.32,39.09 R61.1
N104745: length 1.5
  TOP w0.203: R69.2 57.21,40.98 57.22,40.98 D7.2
N156622: length 2.6
  TOP w0.203: IC4.4 71.09,74.41 R33.2
N156630: length 3.7
  TOP w0.203: R32.2 71.13,76.87 71.13,76.86 R33.1 71.13,75.09 71.59,74.62 IC4.3
N156646: length 5.5
  TOP w0.203: C30.1 67.4,78.59 67.42,78.57 R36.1 67.44,77.22 R32.1 69.73,78.75 R31.2
N156654: length 9.9
  TOP w0.203: C98.2 75.7,75.83 75.36,76.17 75.36,77.7 75.65,77.99 76.62,77.99 76.92,78.29 C27.2 76.92,78.81 R28.2 R29.1
